# Altium PCB PCB2.PcbDoc (part 1 of 3)
Units mm, origin at the board's own origin, x right, y up, seen from the top; angles counter-clockwise.
Board outline 51.19 x 48.9 mm, 6 copper layers (Top Layer, Internal Plane 1, Signal Layer 3, Signal Layer 2, Internal Plane 2, Bottom Layer), stack 1.58 mm thick; 165 components, 90 nets, 480 pads, 1318 vias.
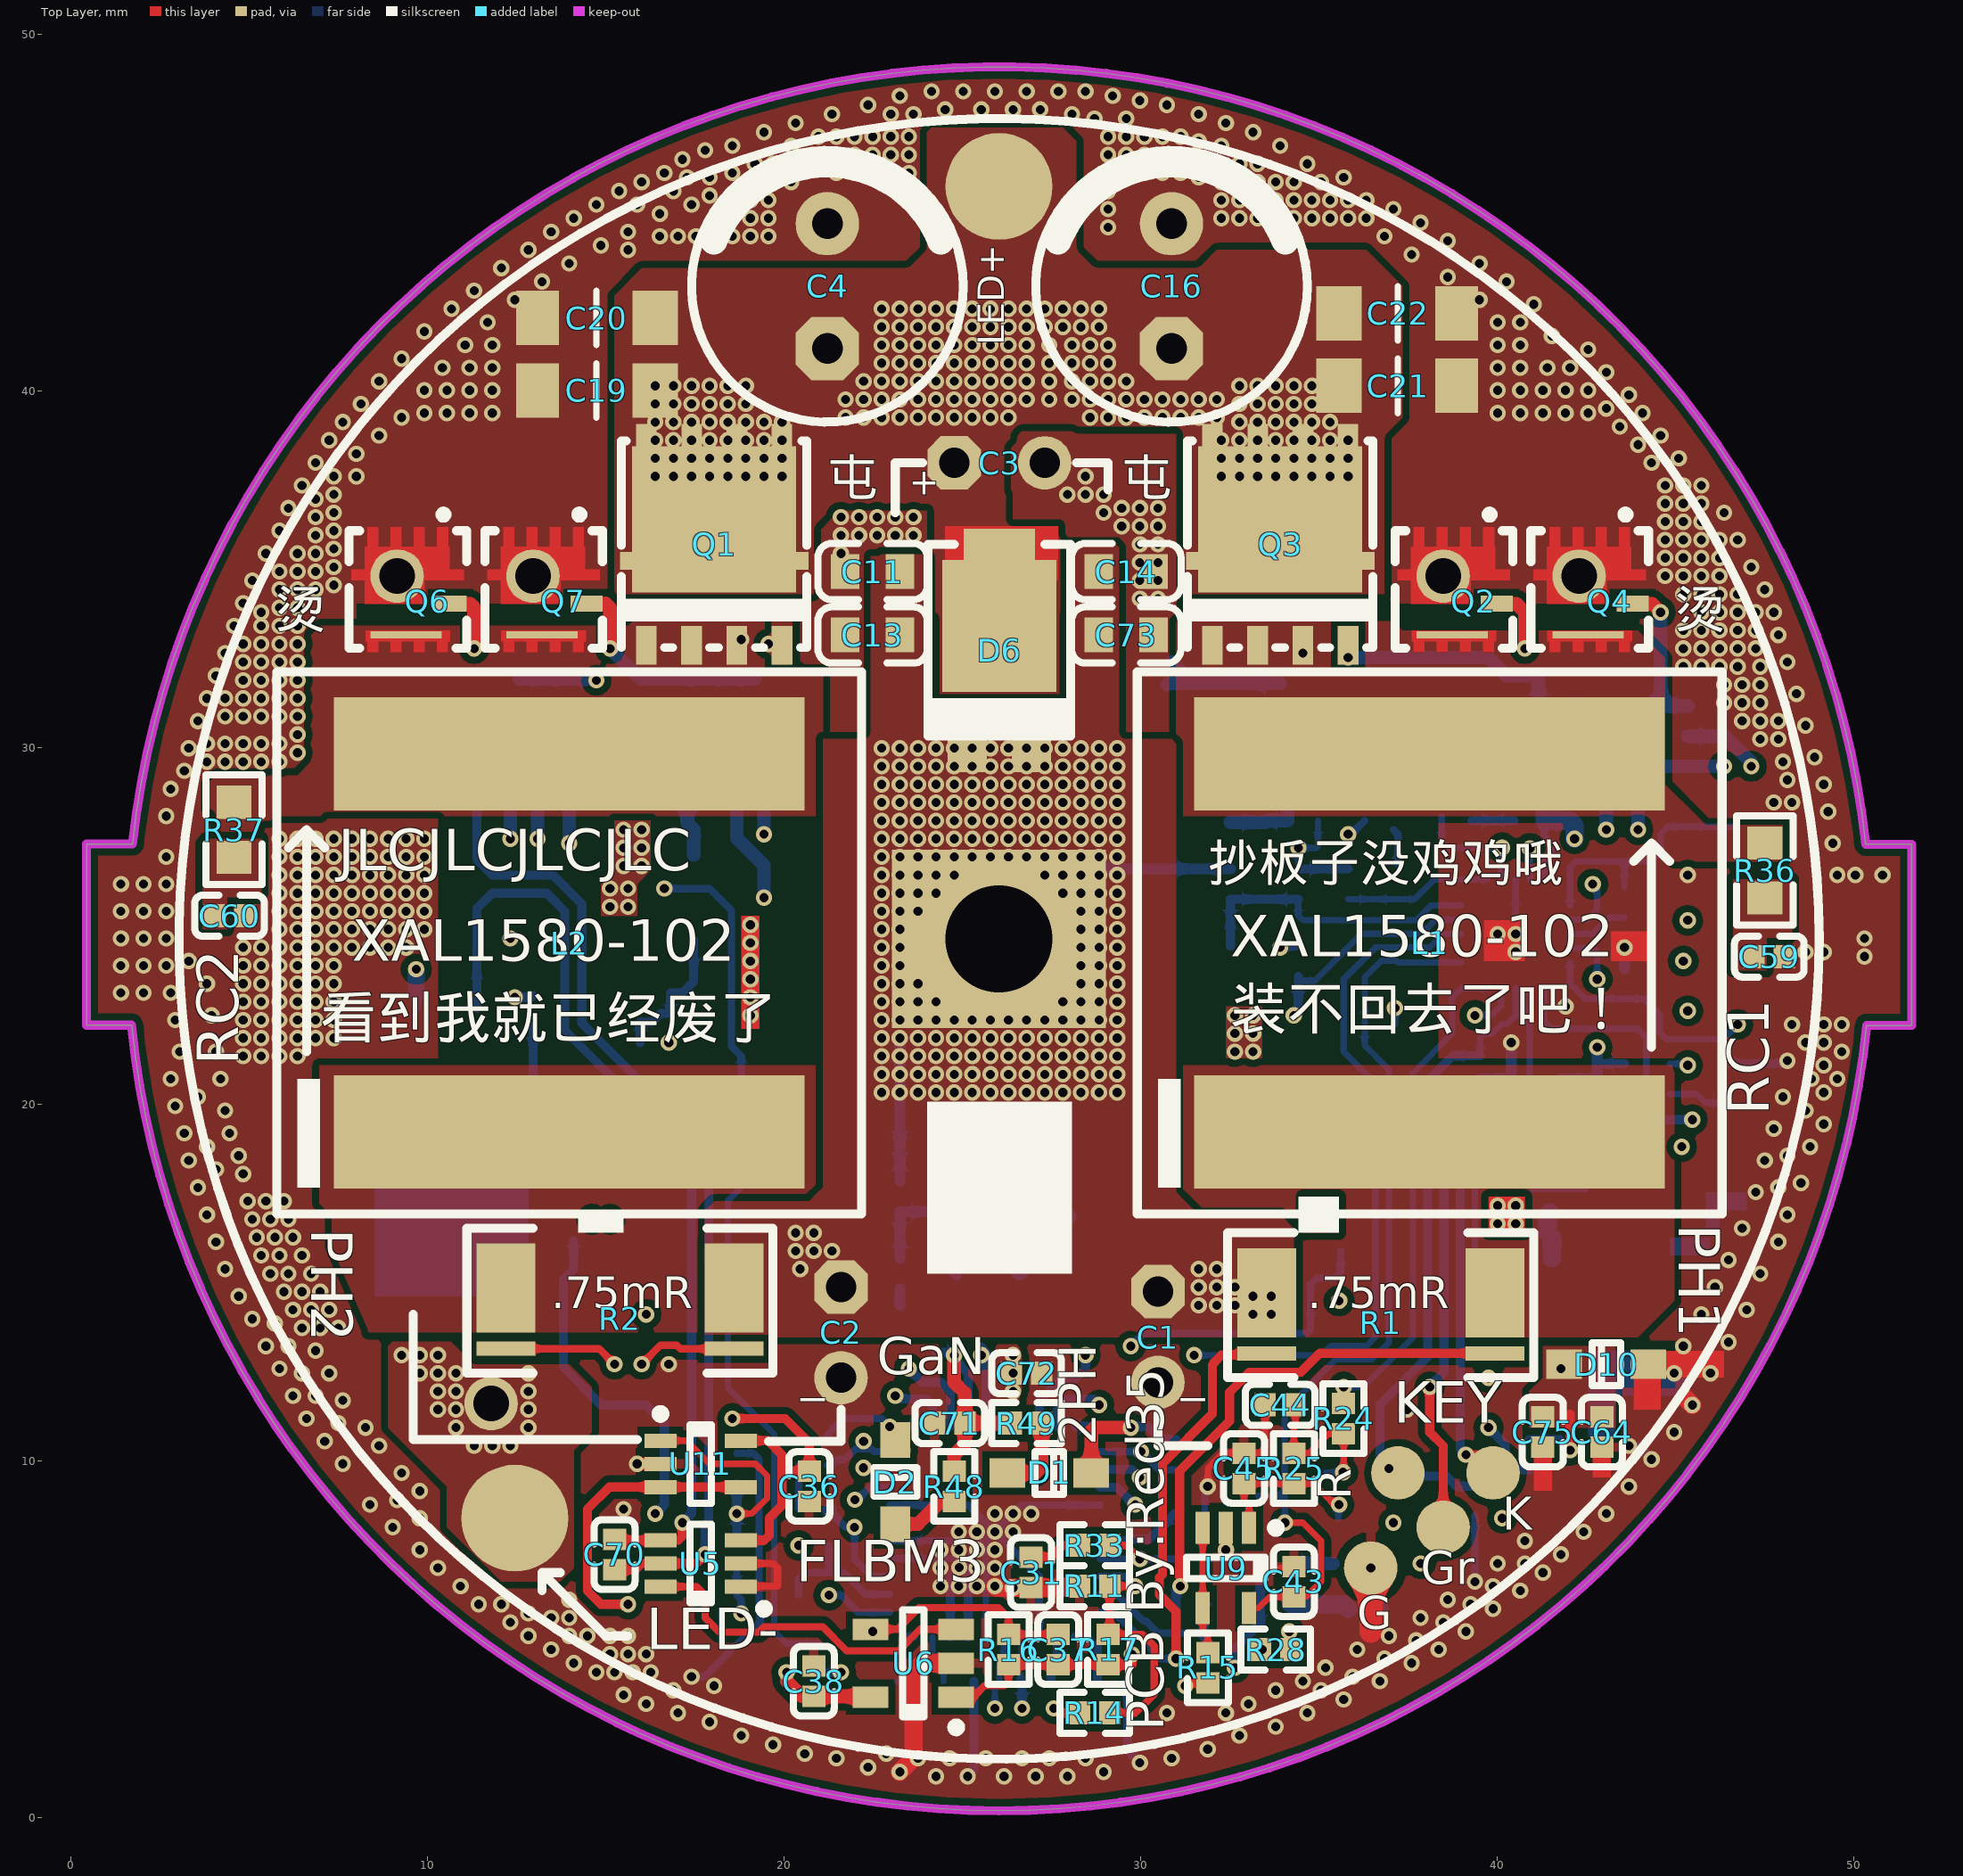
[diagram p0: Top Layer view]
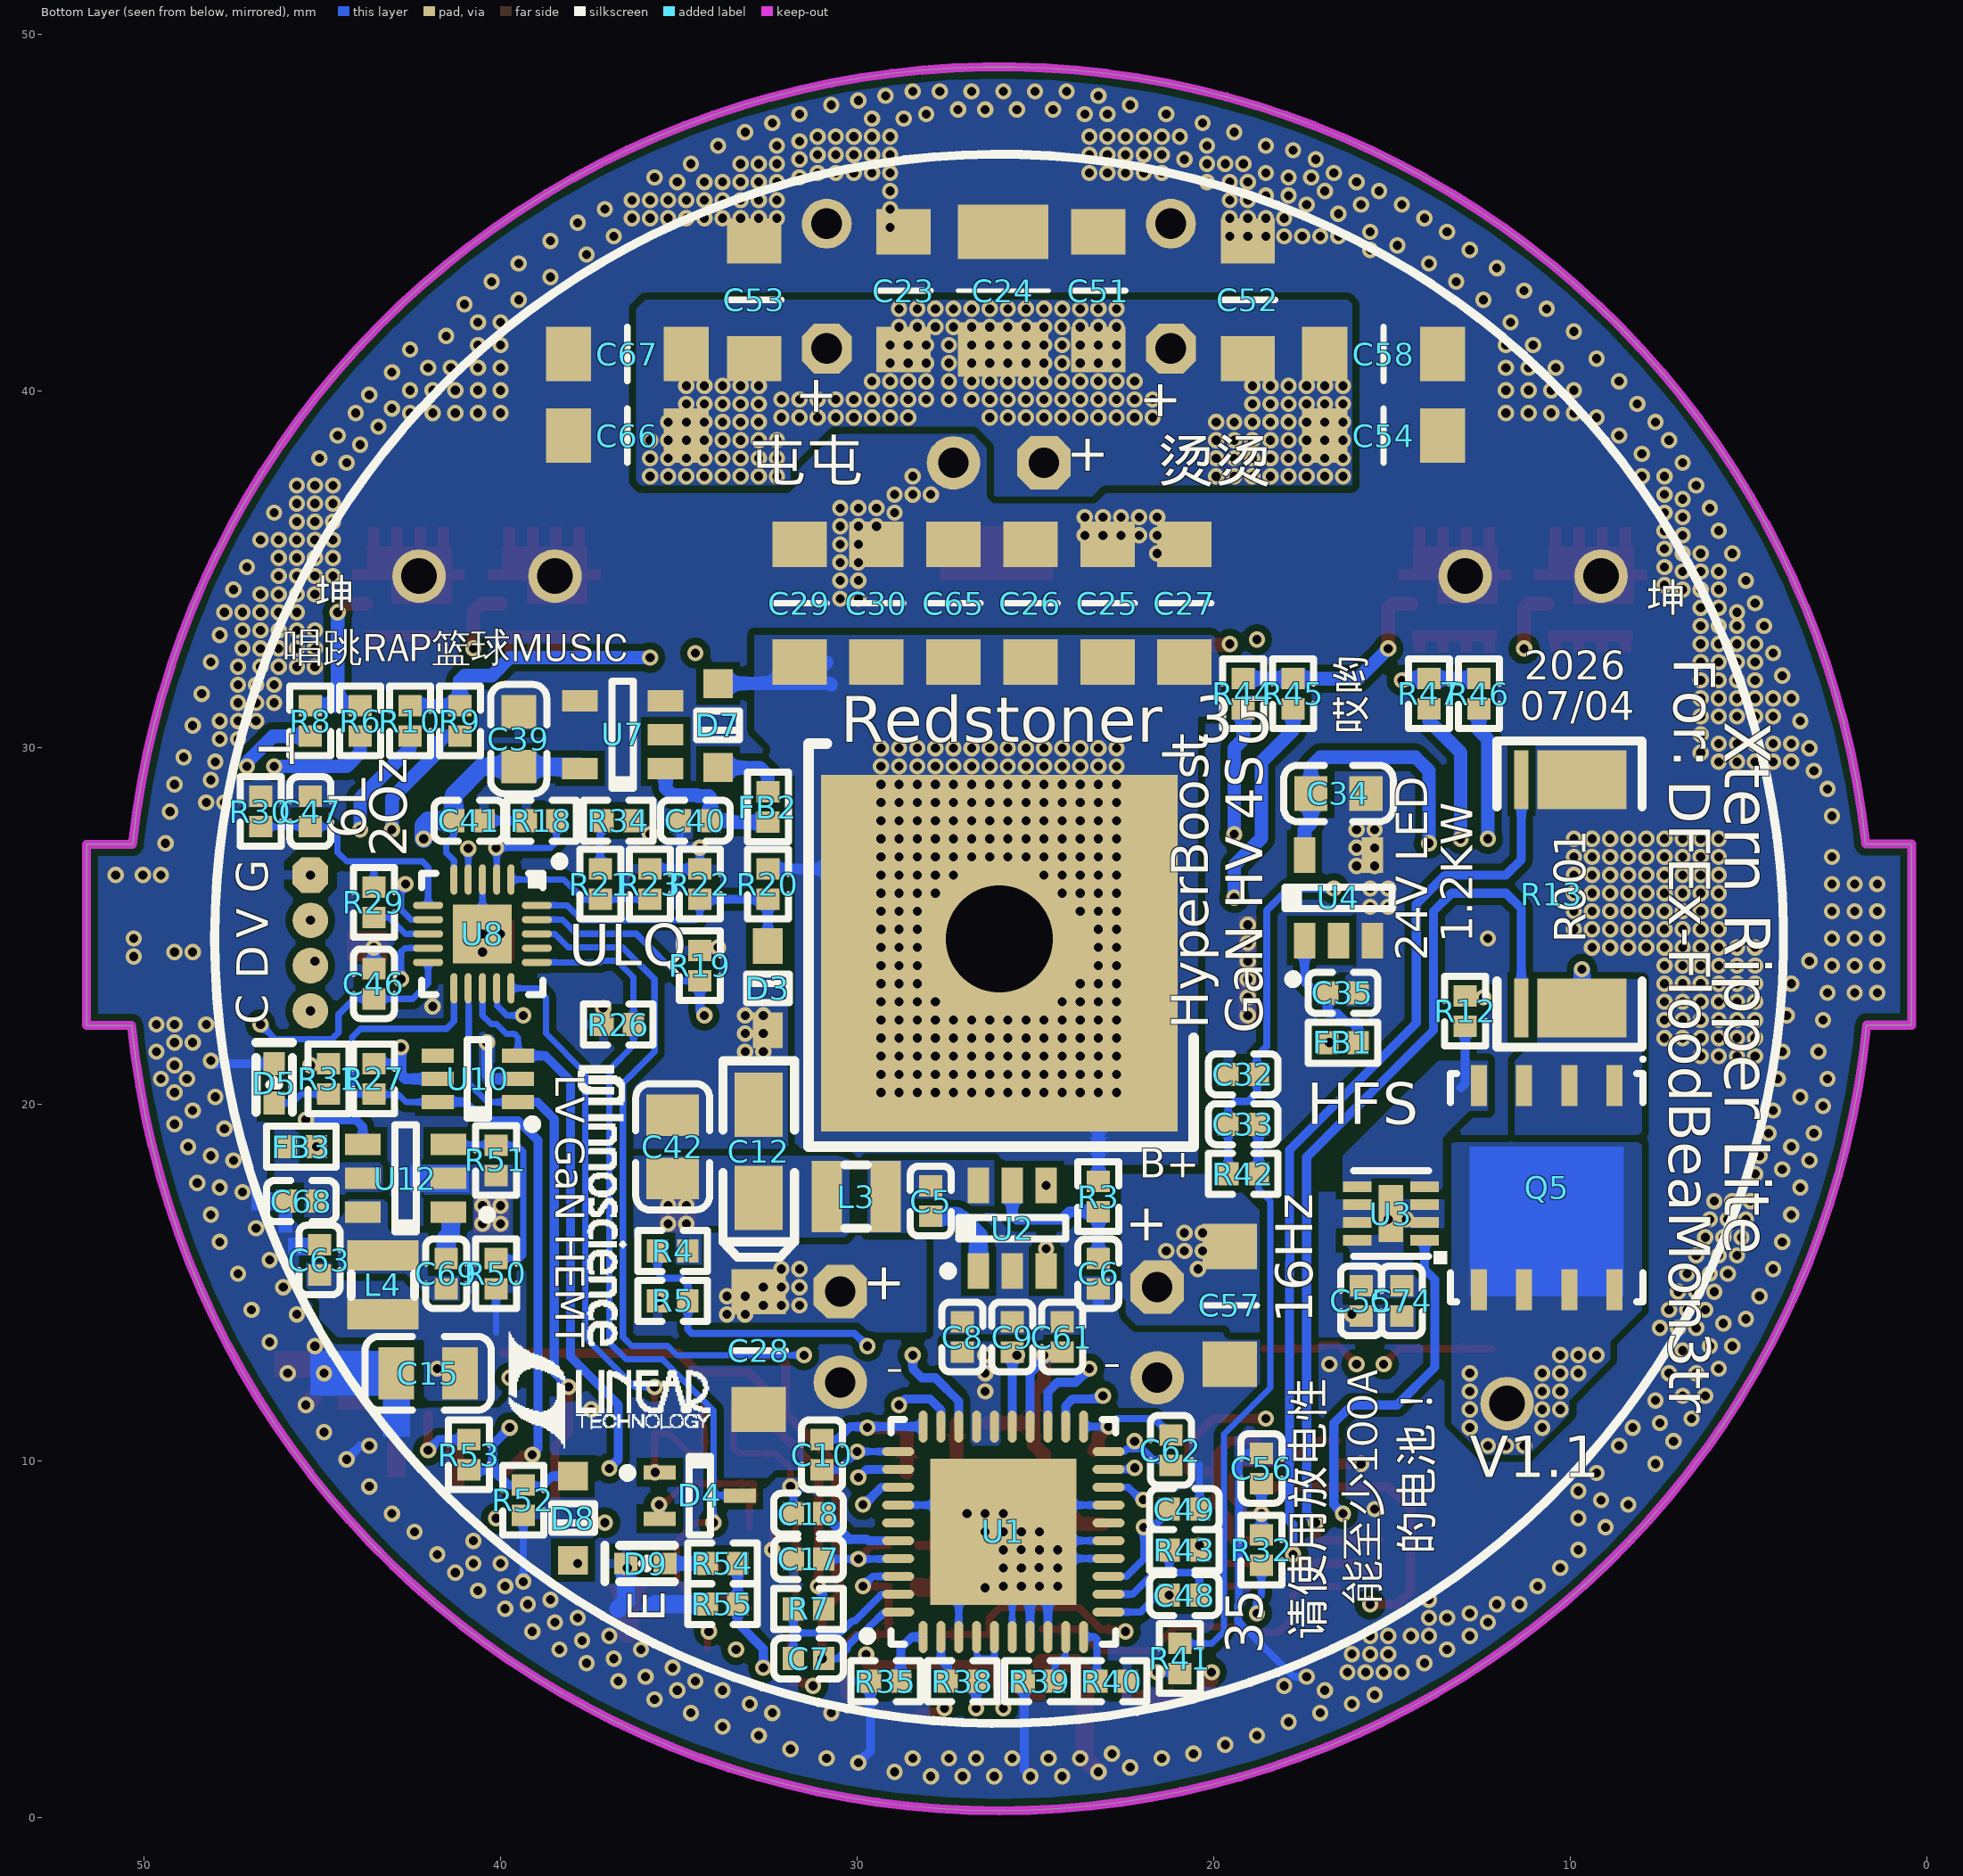
[diagram p1: Bottom Layer view, seen from below]
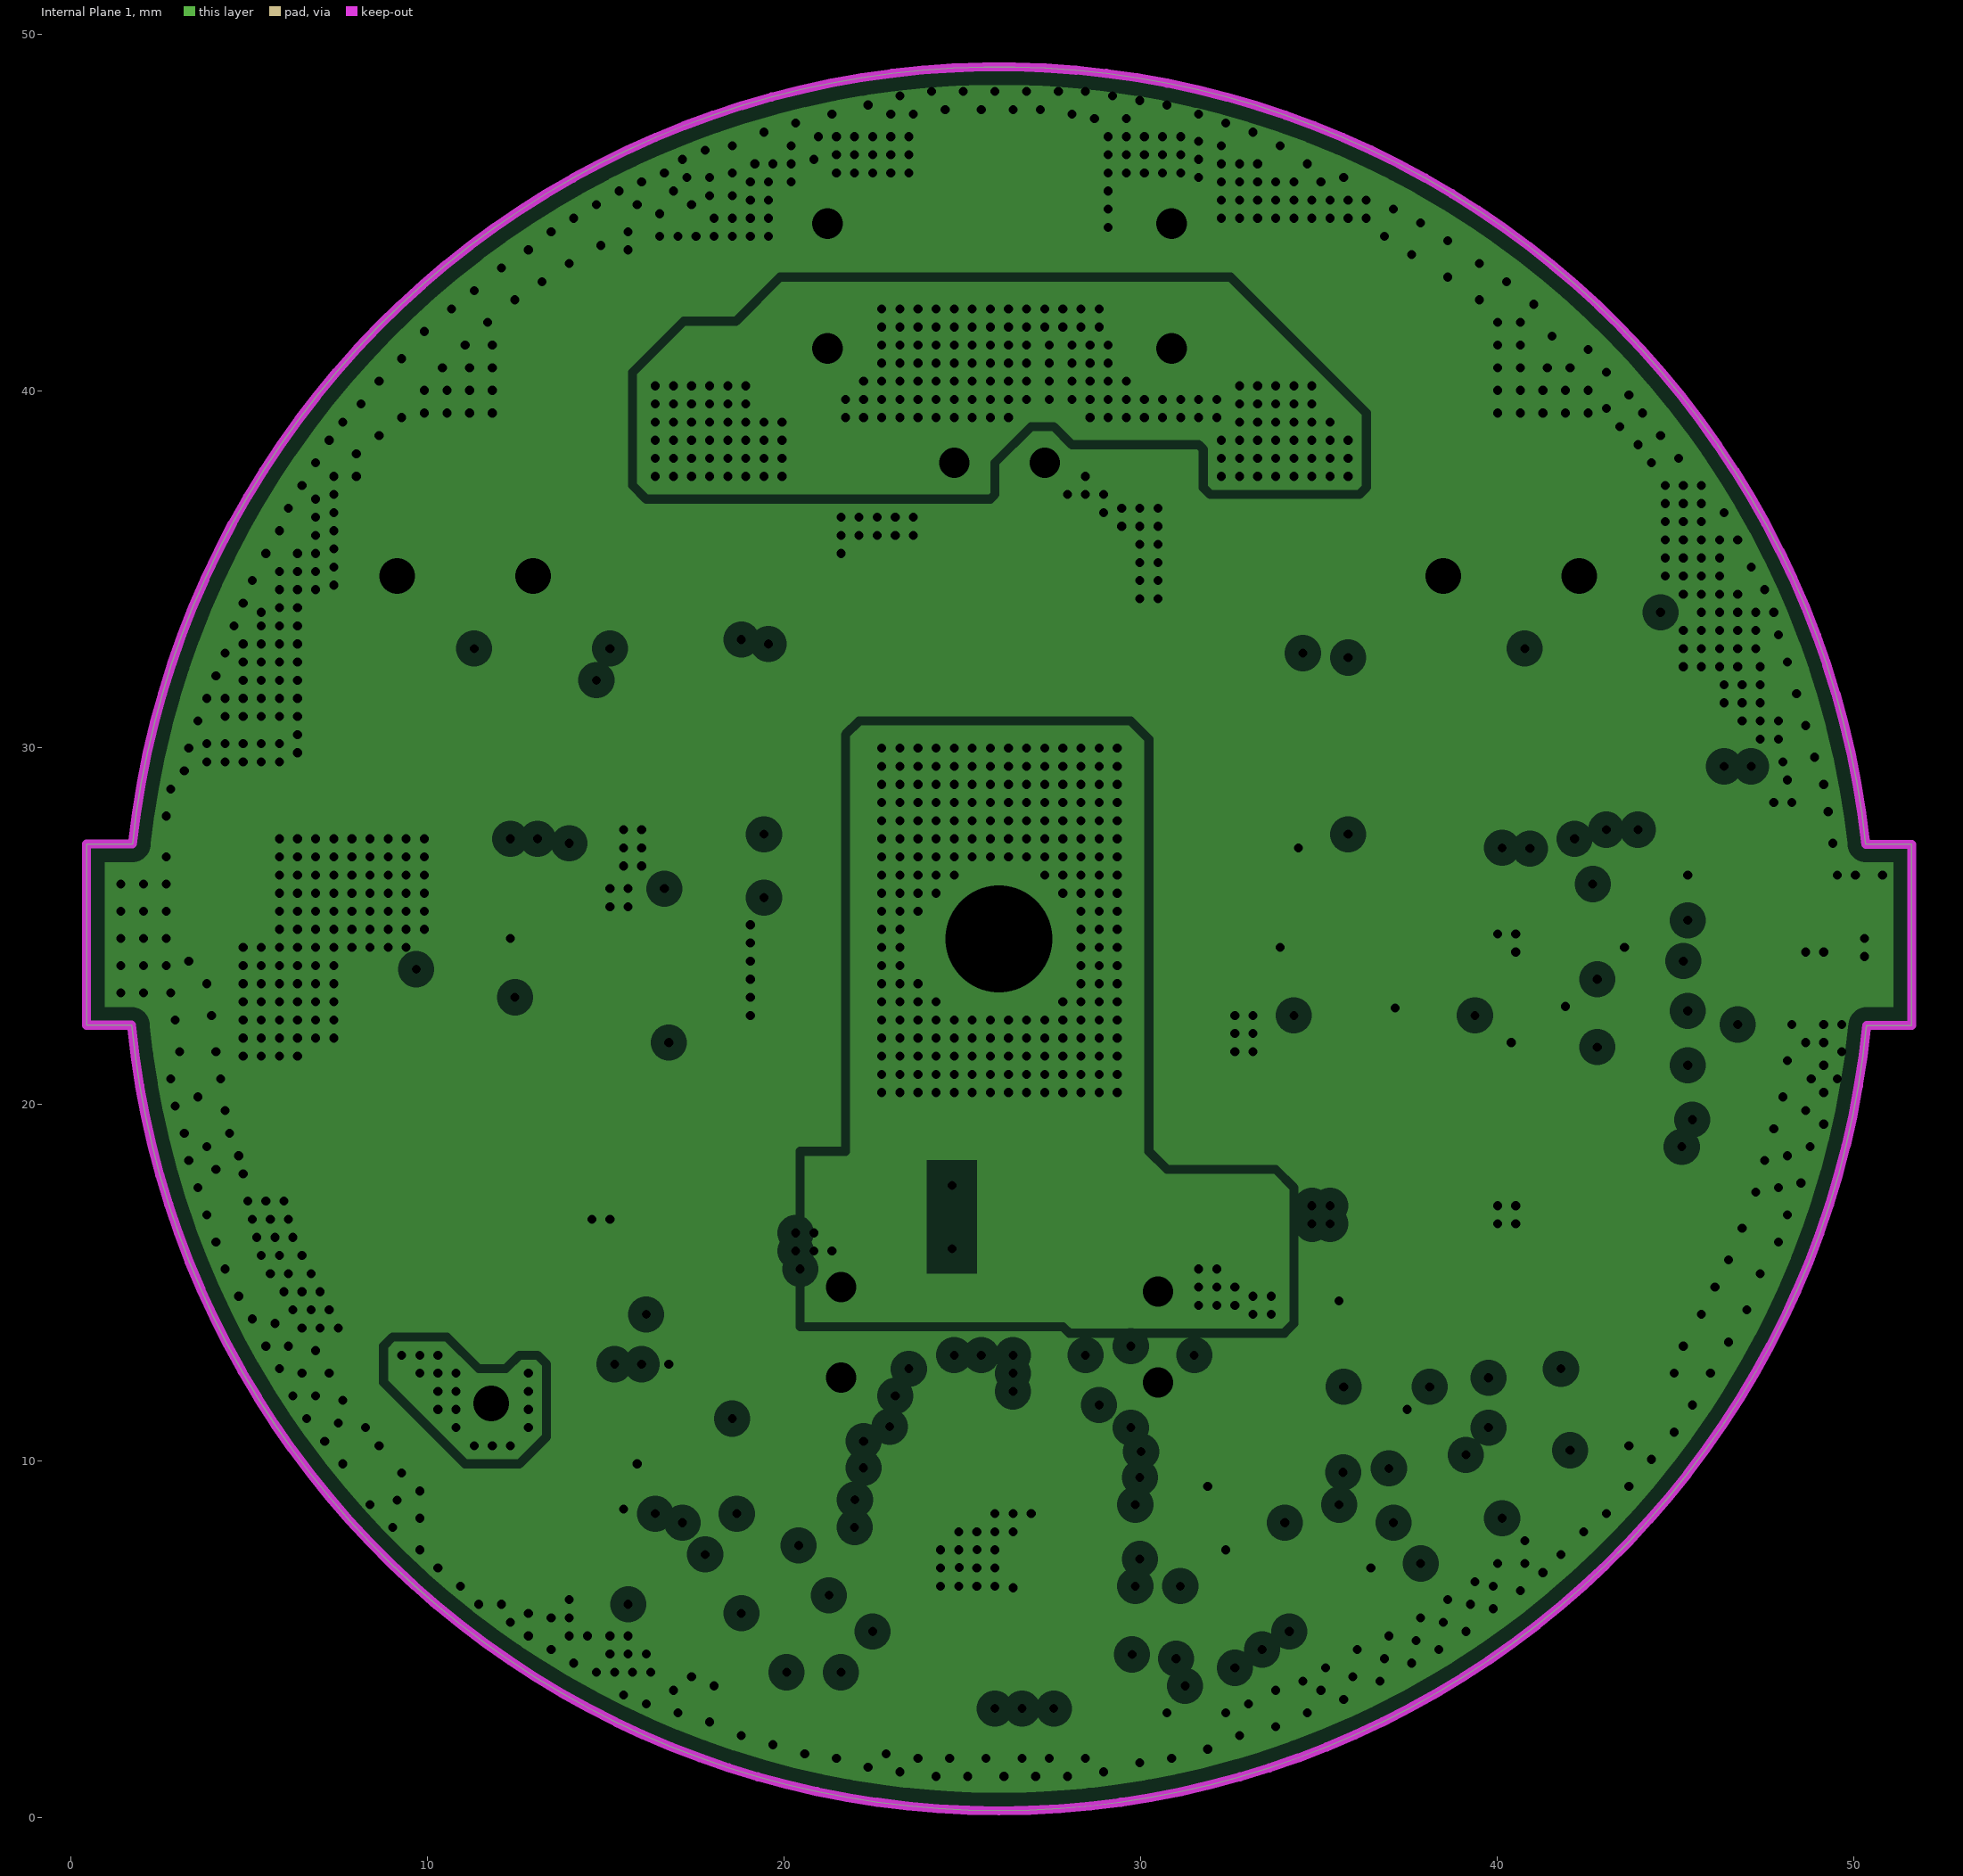
[diagram p2: Internal Plane 1, clearances drawn from the general rule]
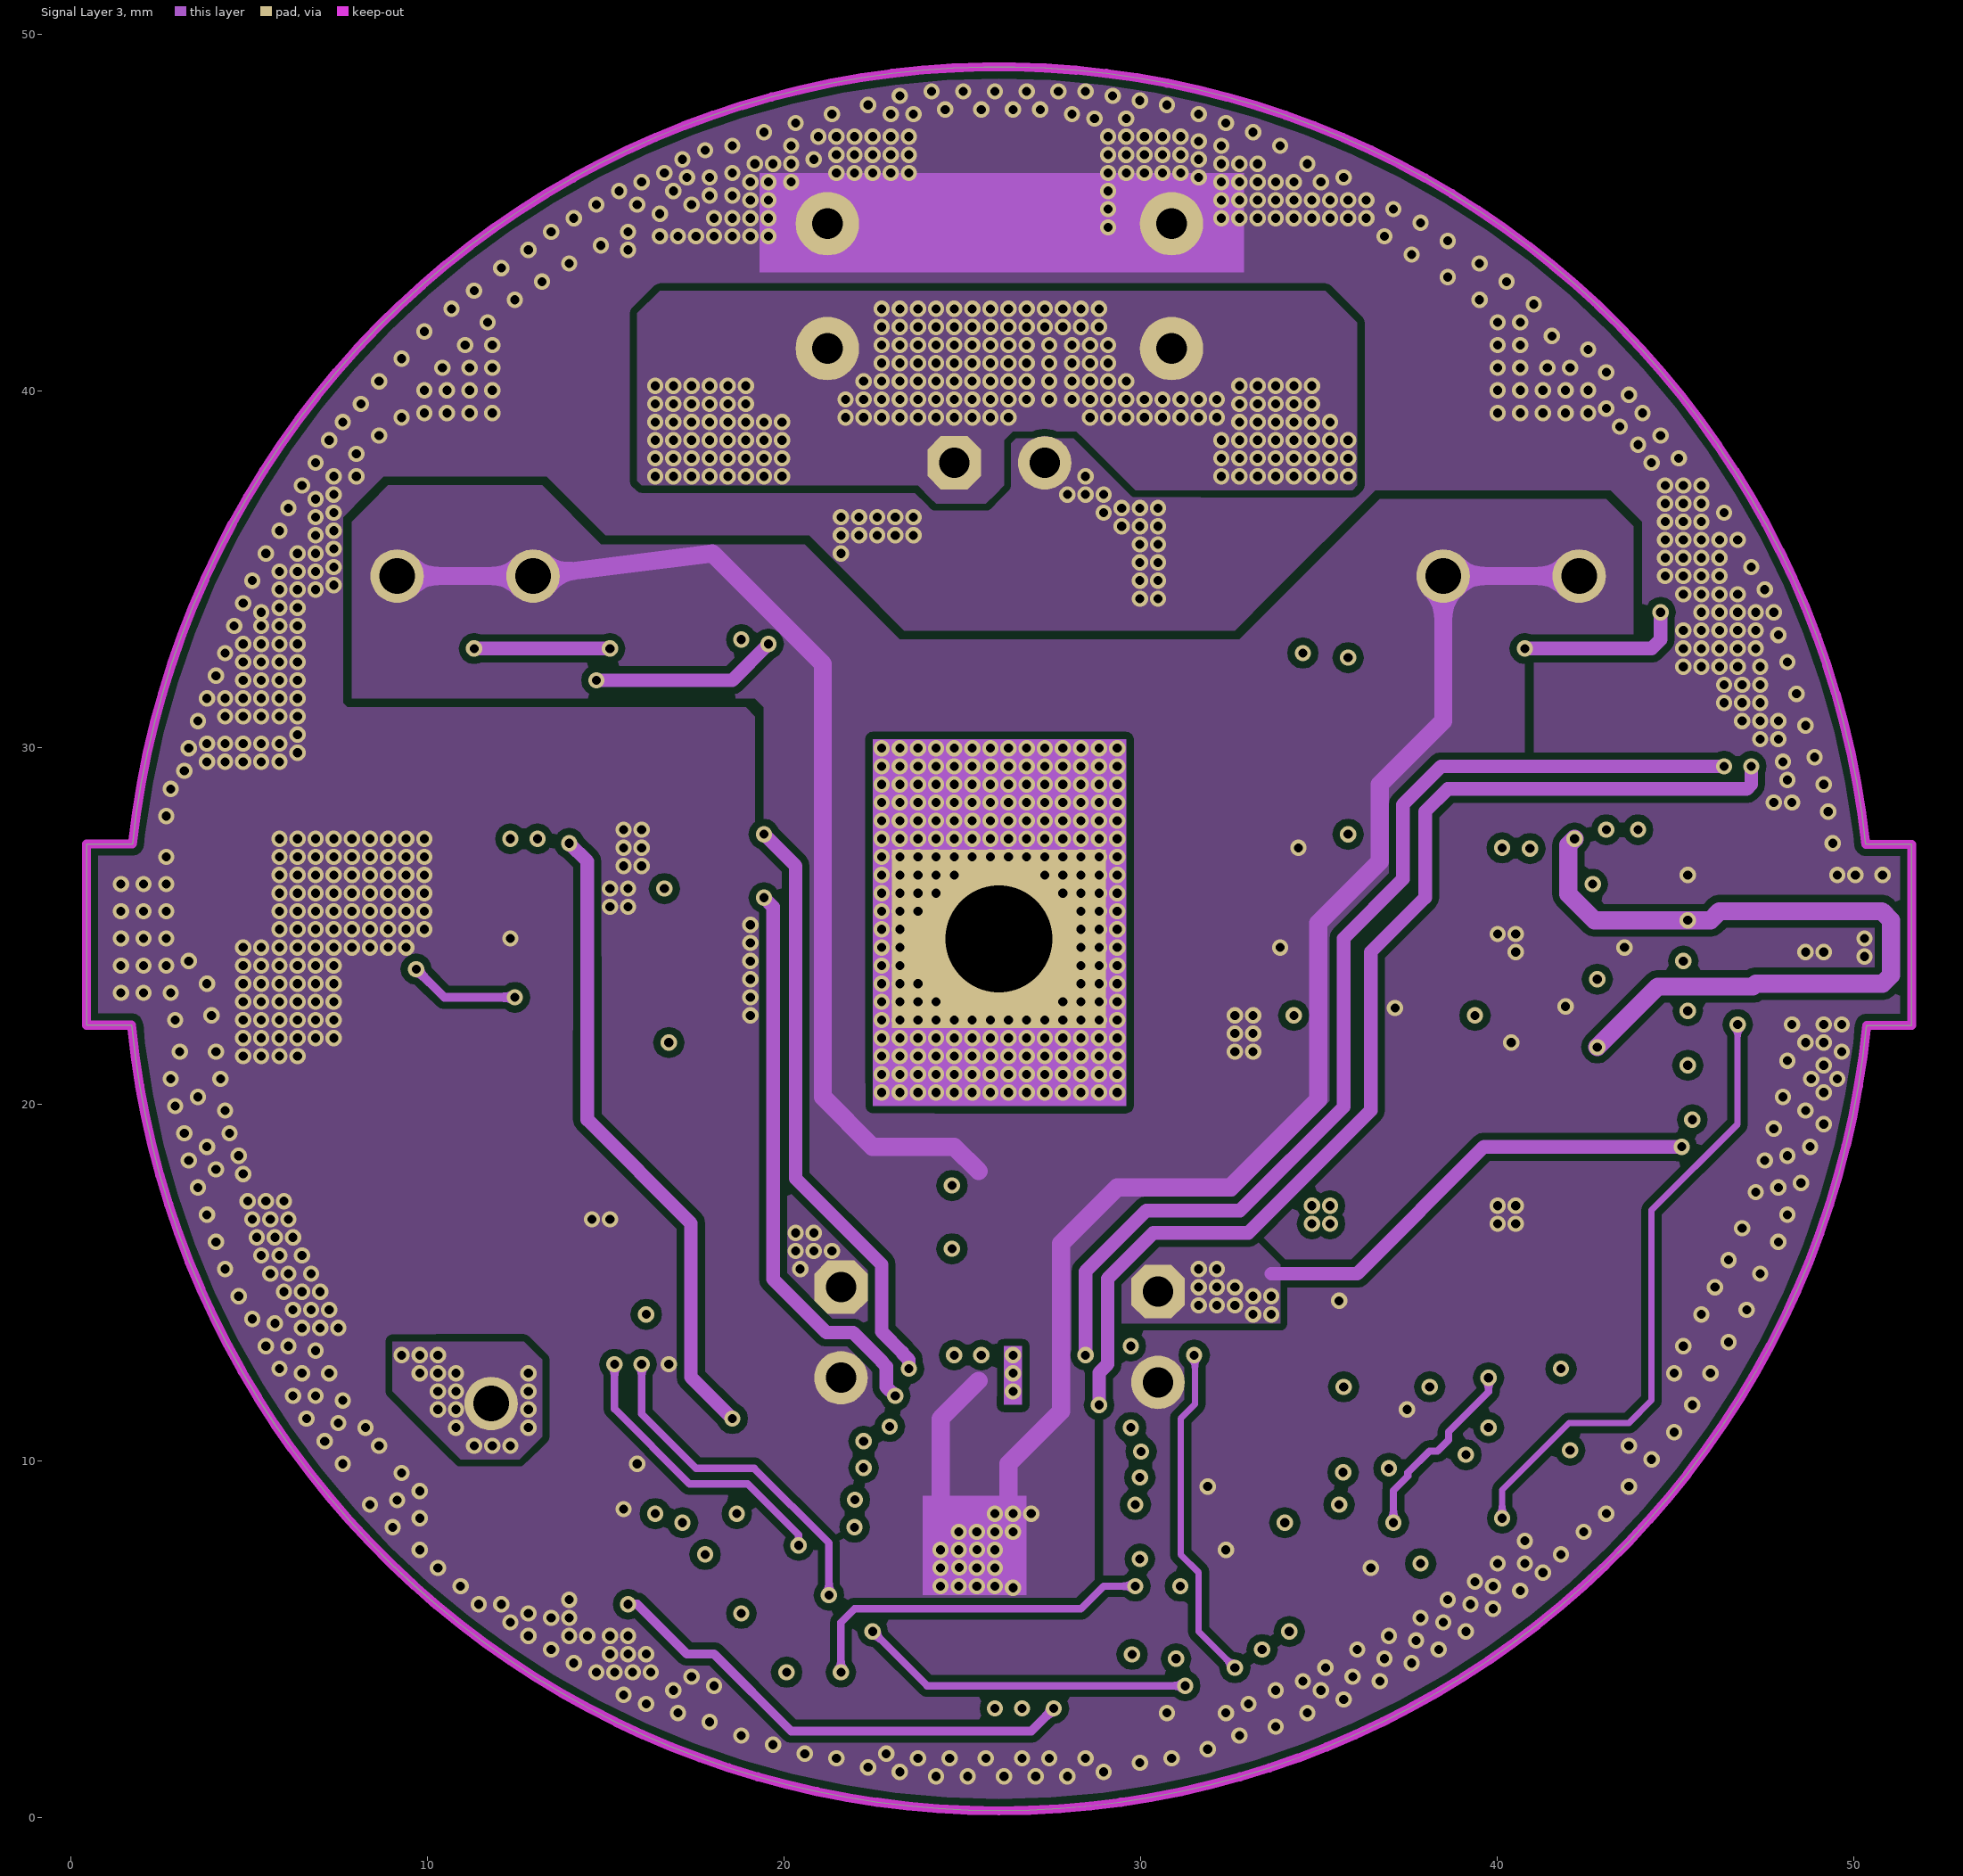
[diagram p3: Signal Layer 3]
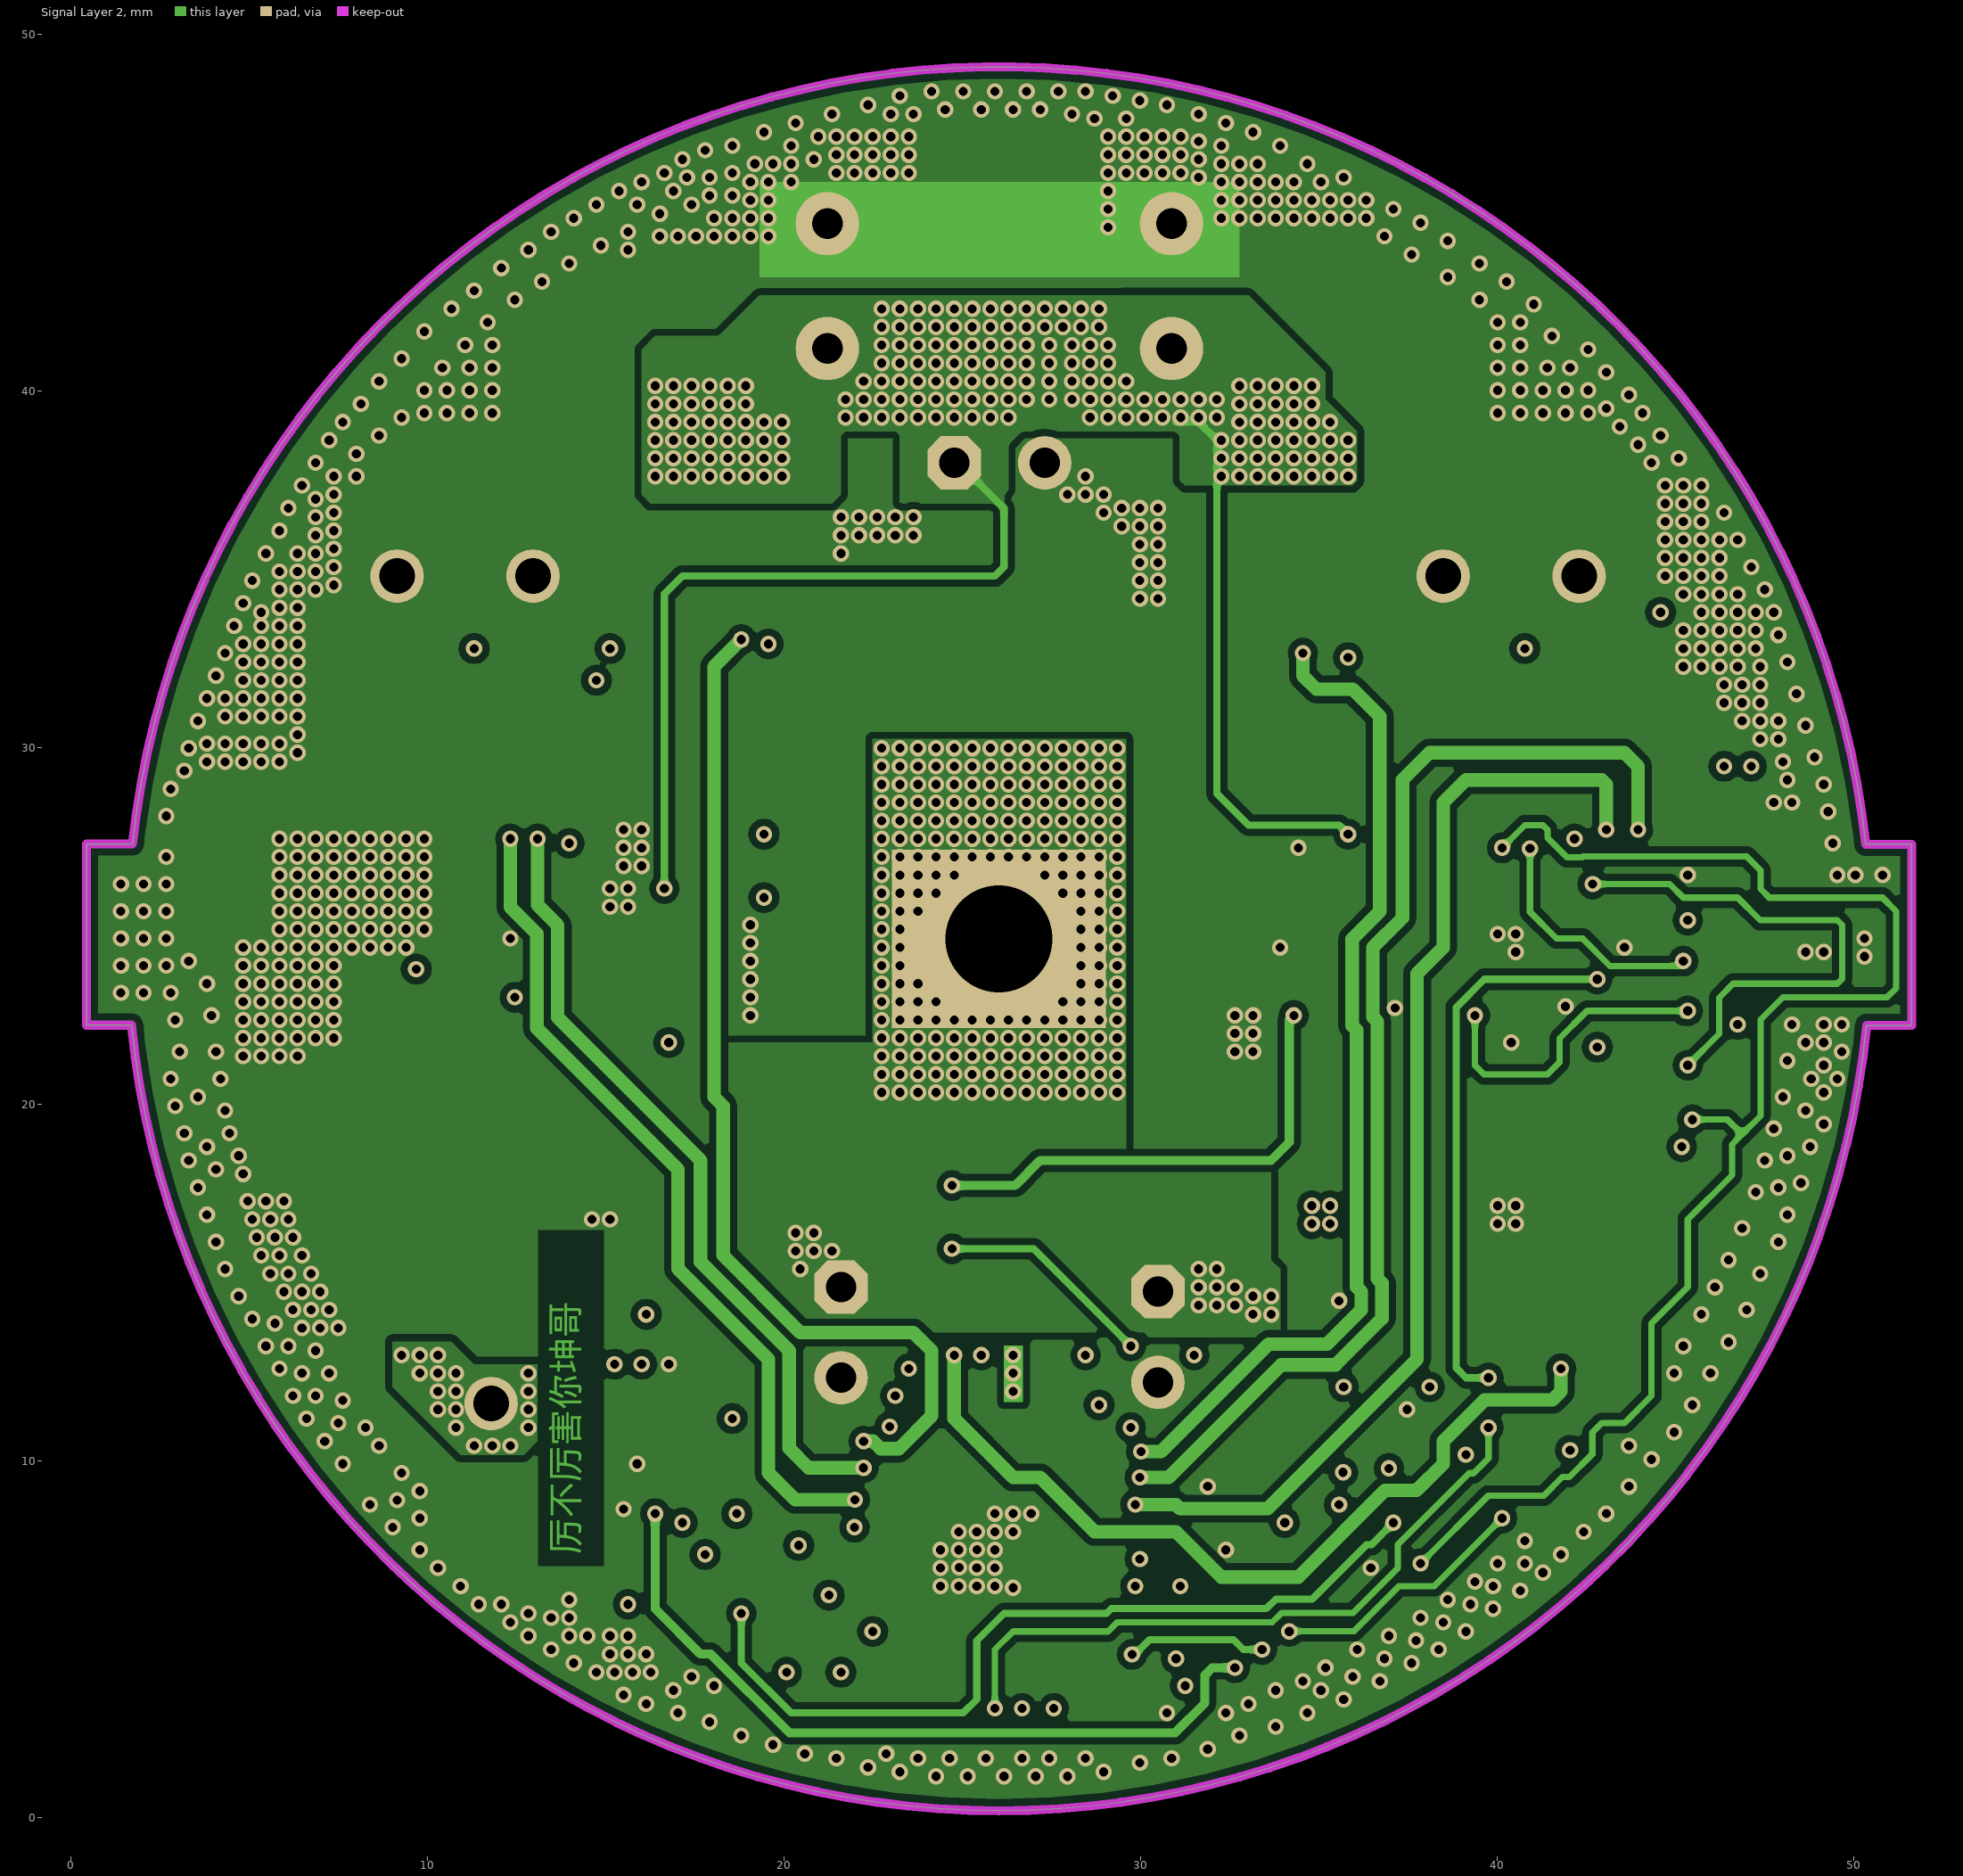
[diagram p4: Signal Layer 2]
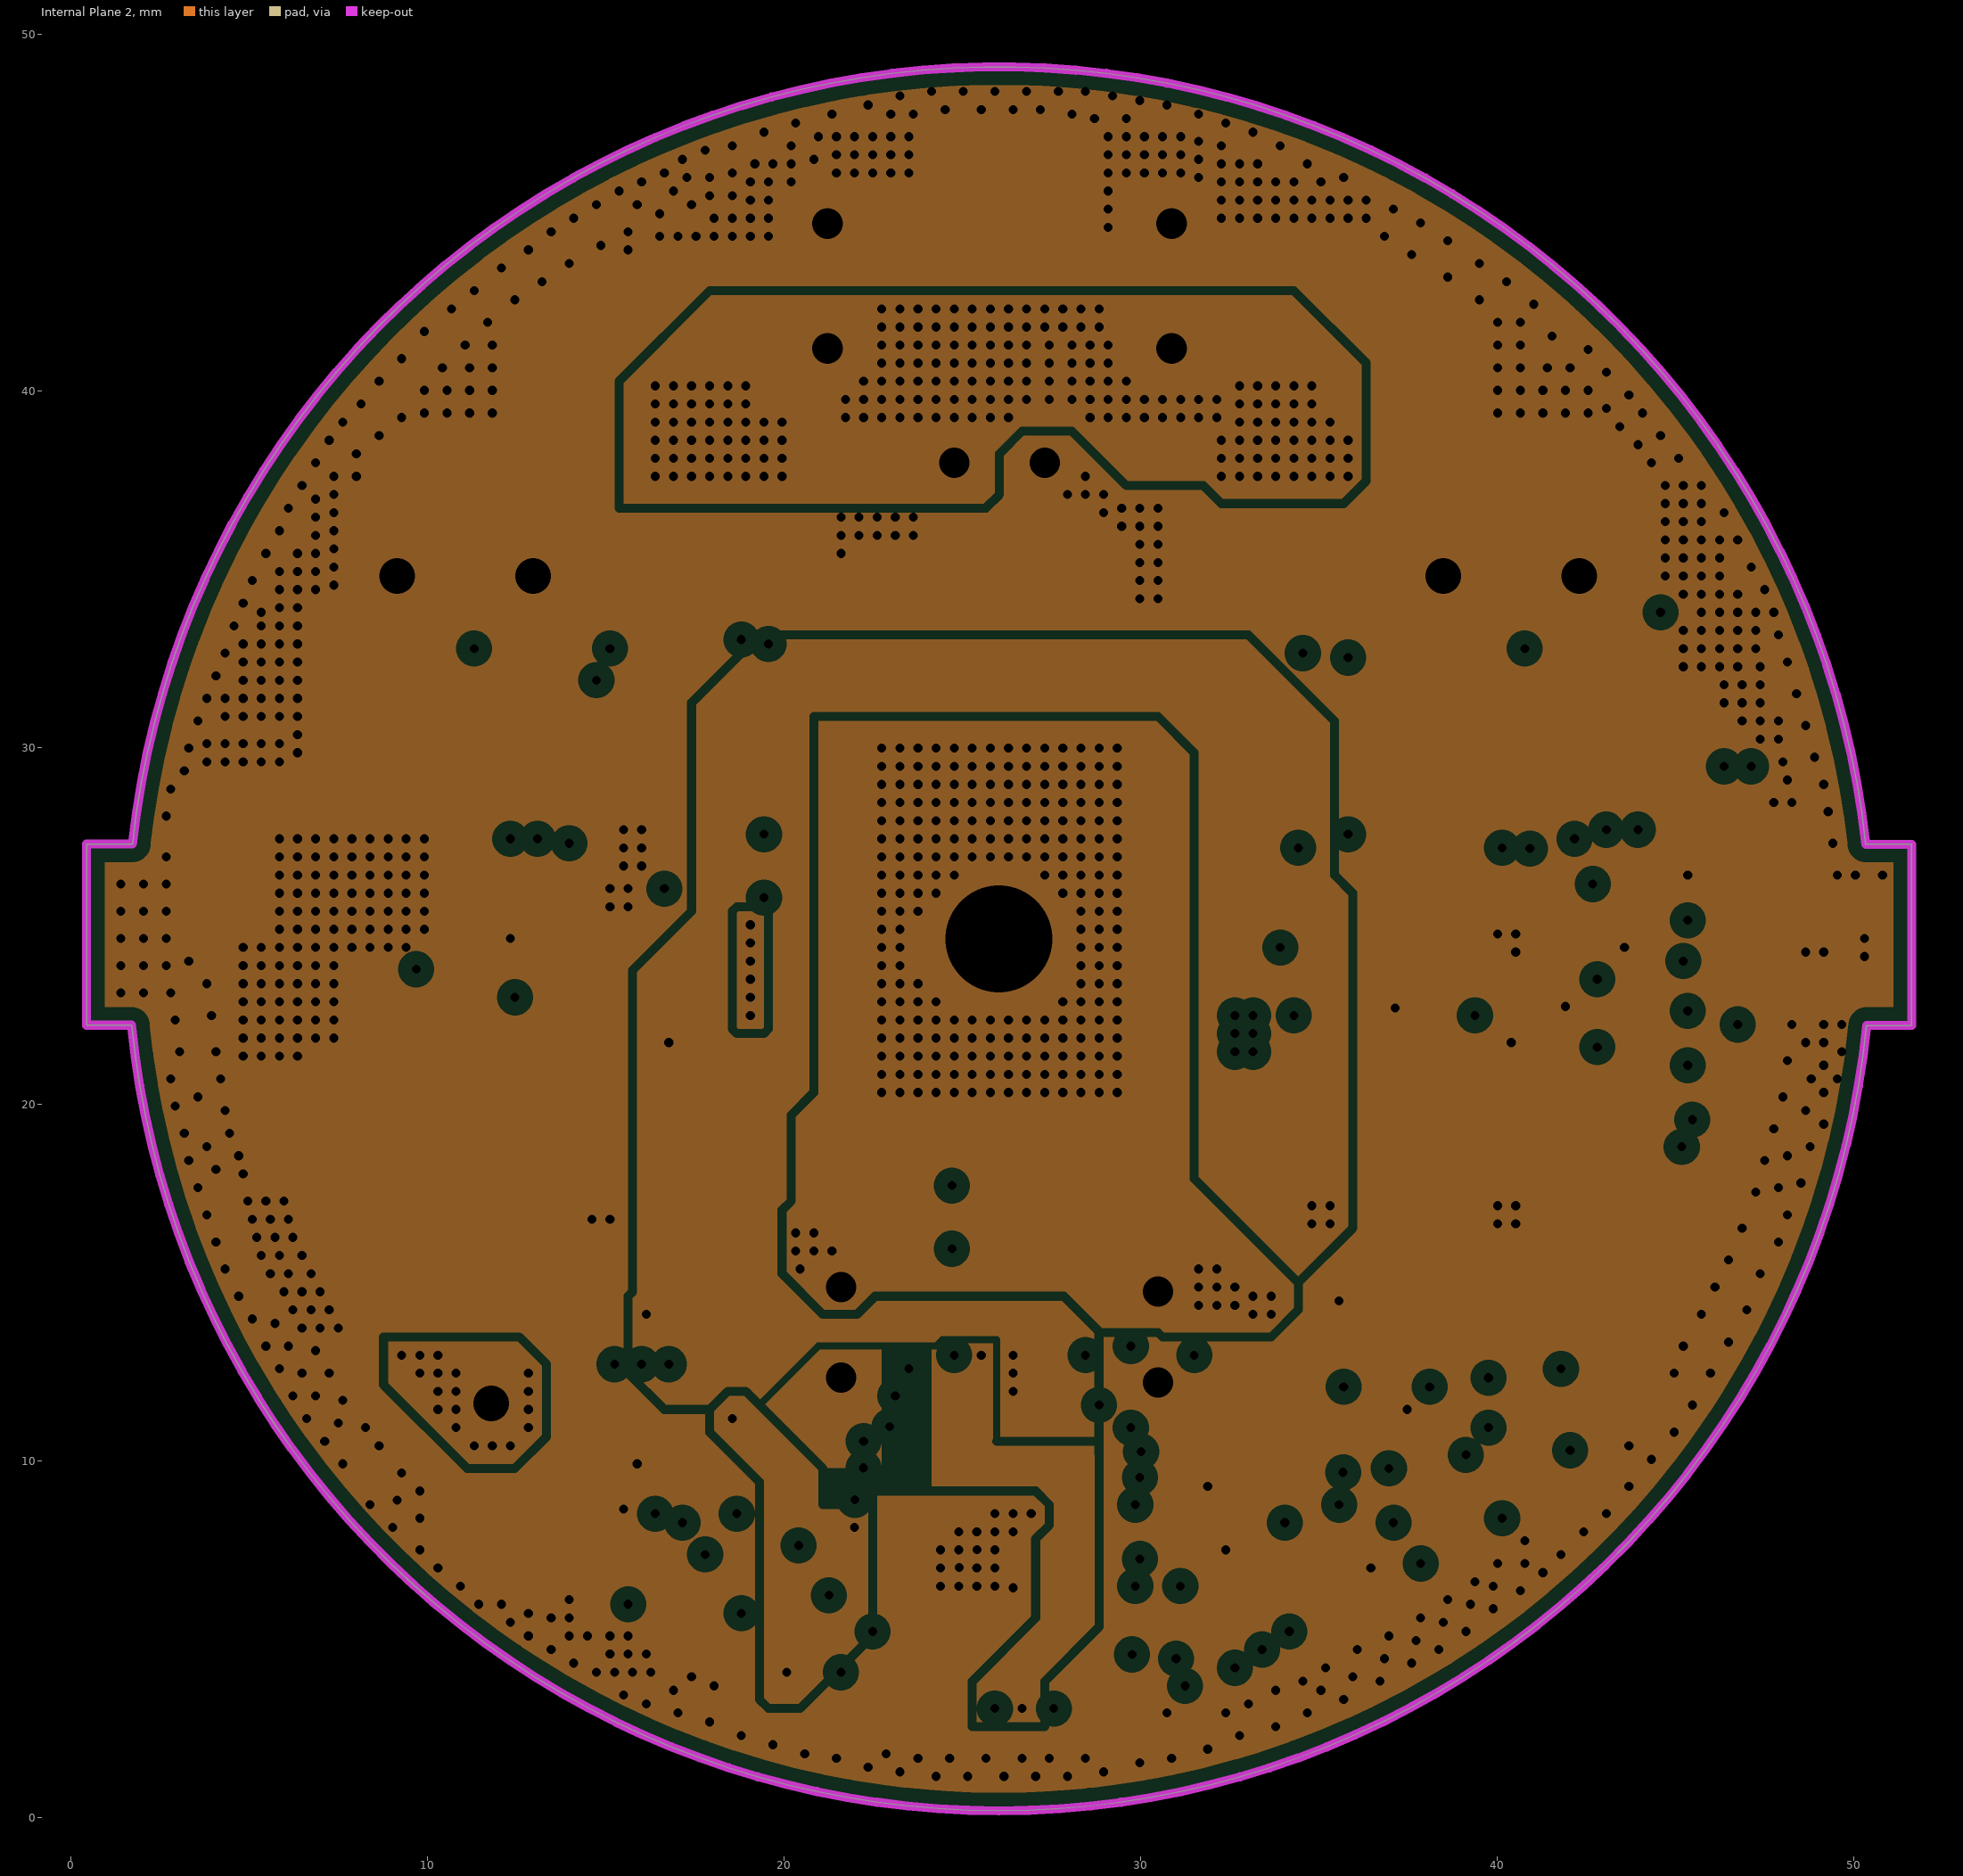
[diagram p5: Internal Plane 2, clearances drawn from the general rule]
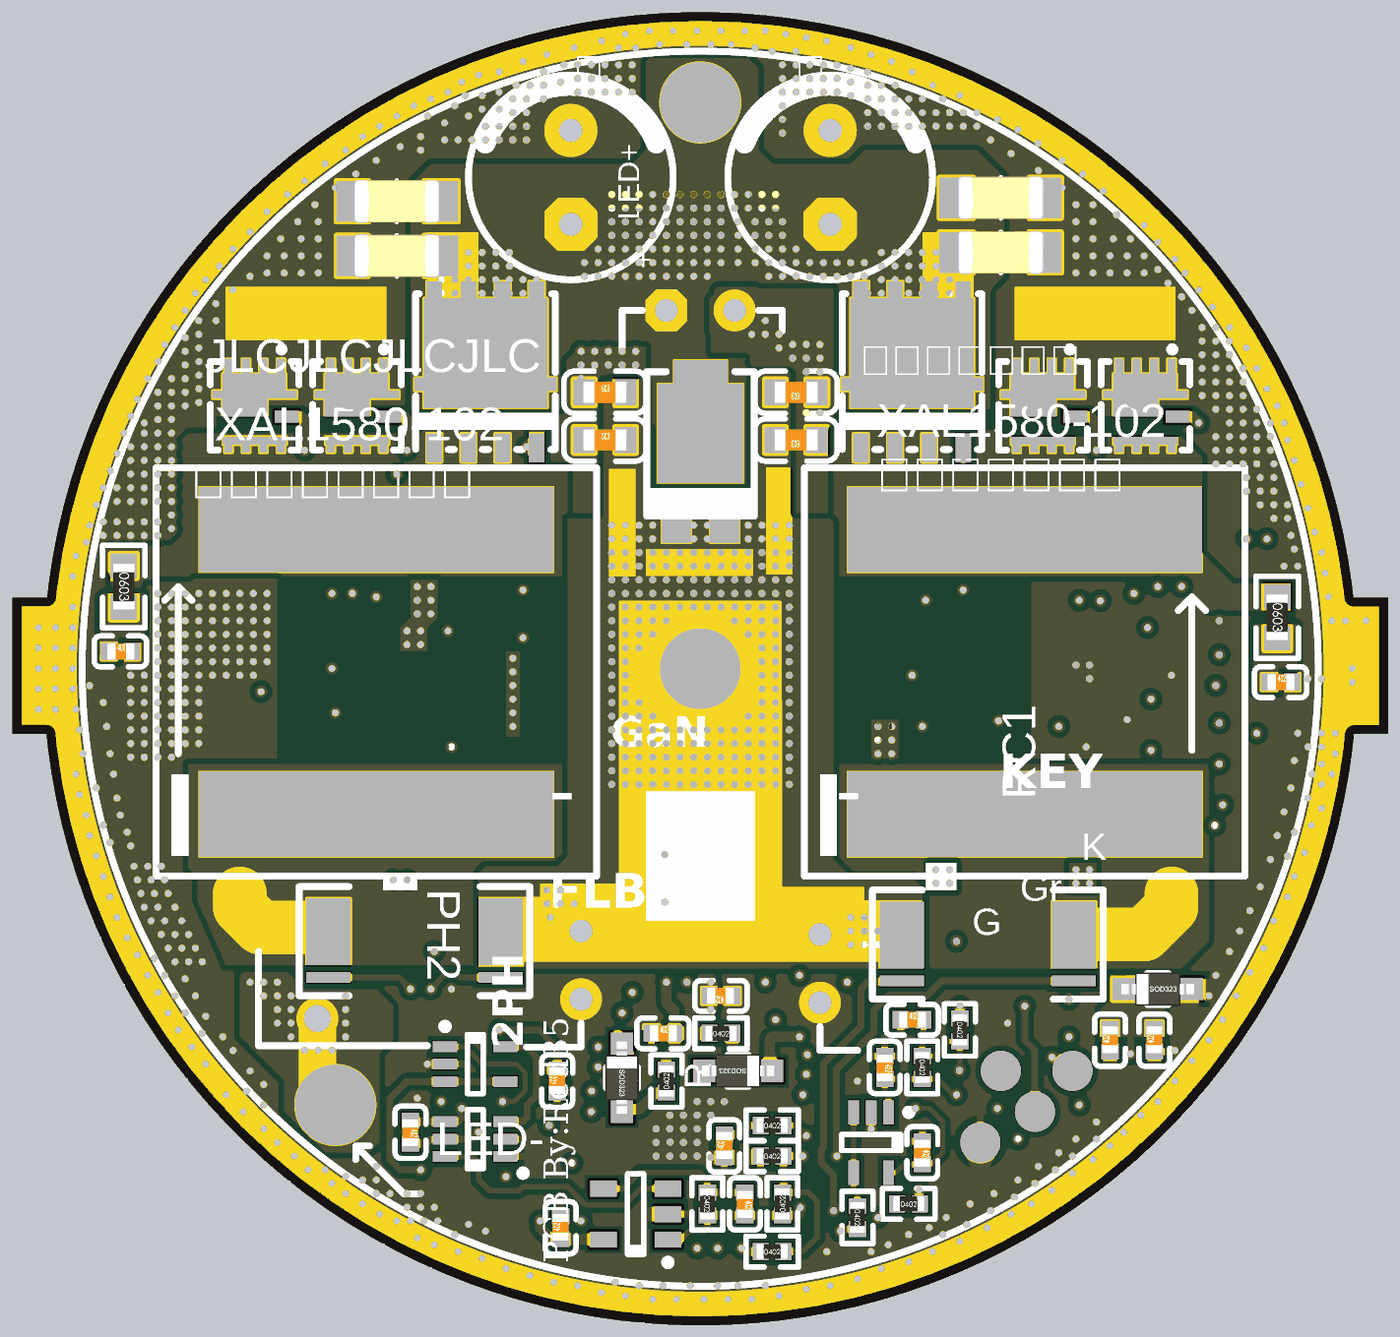
[diagram p8: 3D render of the assembled board from above, using the file's embedded part models]
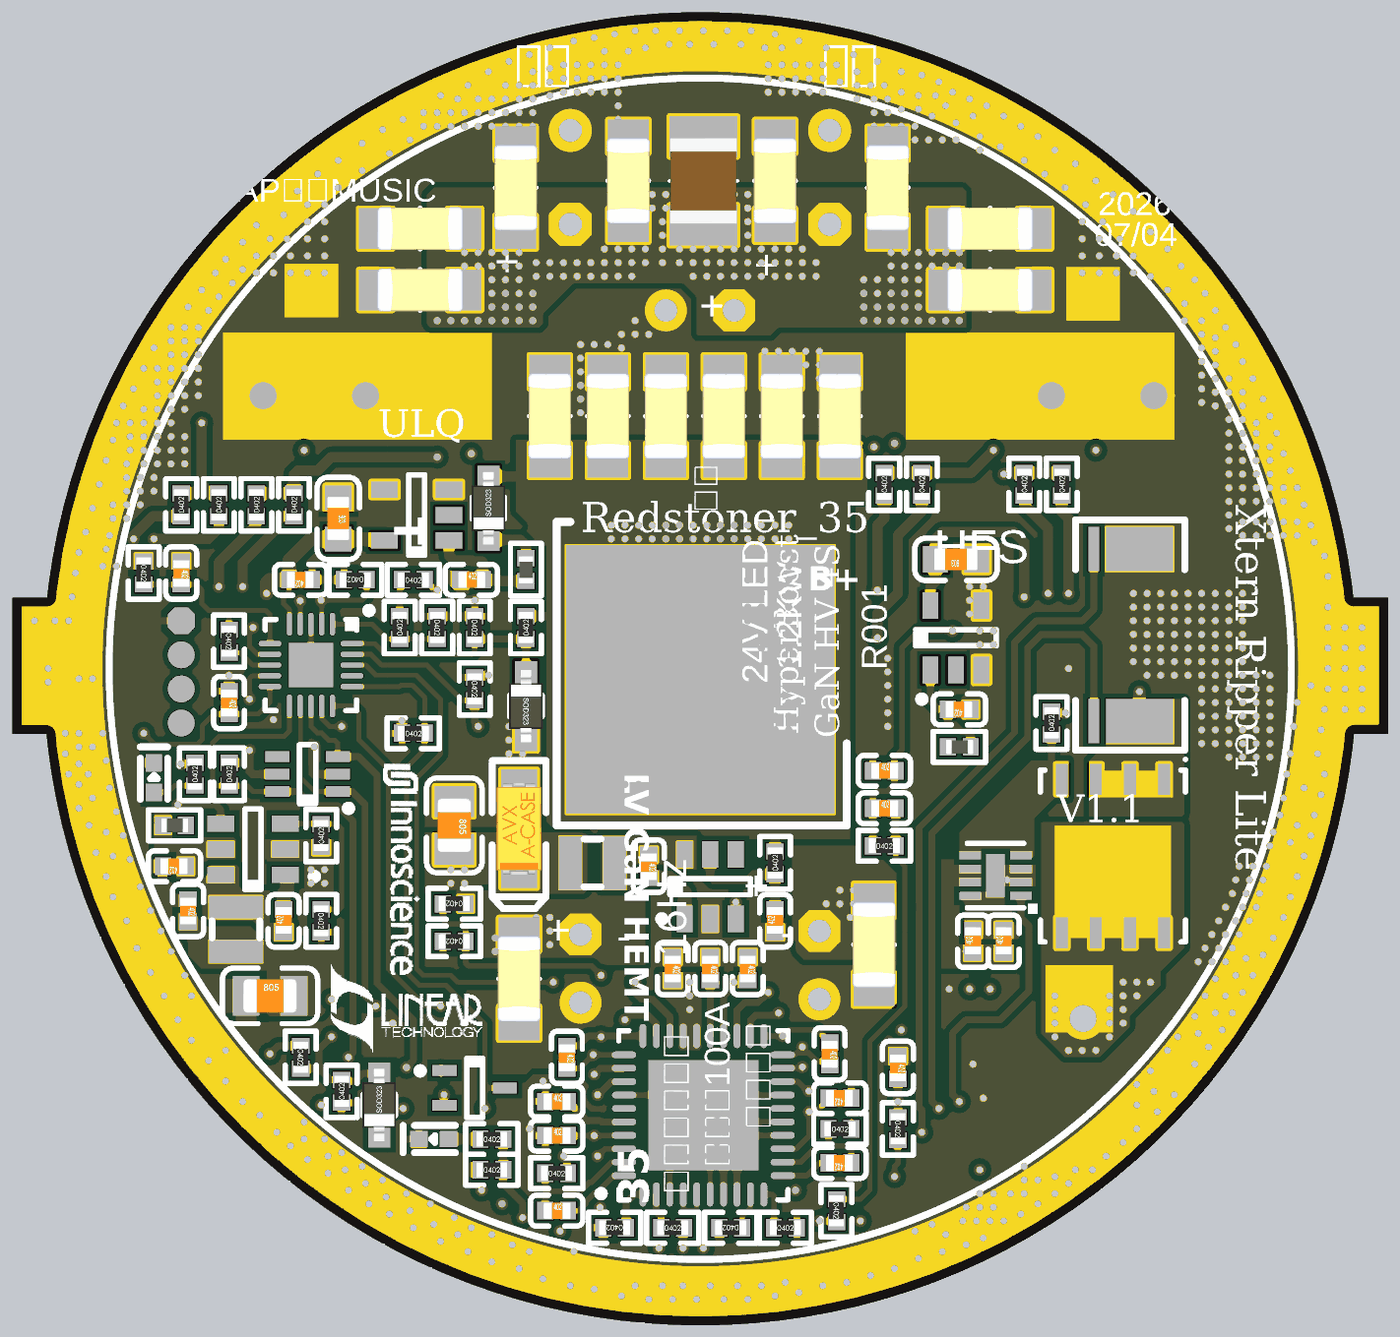
[diagram p9: 3D render of the assembled board from below, using the file's embedded part models]

## Layer stack, top to bottom
Top Solder: solder mask 0.0102, Solder Resist, Dk 3.5
Top Layer: signal copper 0.07
Dielectric 1: core 0.254, FR-4, Dk 4.2
Internal Plane 1: plane copper 0.07
Dielectric 3: prepreg 0.2887, Dk 4.2
Signal Layer 3: signal copper 0.07
Dielectric 4: core 0.27, Dk 4.2
Signal Layer 2: signal copper 0.036
Dielectric 2: core 0.254, Dk 4.2
Internal Plane 2: plane copper 0.07
Dielectric 5: prepreg 0.127, Dk 4.2
Bottom Layer: signal copper 0.07
Bottom Solder: solder mask 0.0102, Solder Resist, Dk 3.5

## Board outline
0.432,22.204 0.432,27.284 1.72,27.284 cw(c26.025,24.628) 50.331,27.277 51.618,27.277 51.618,22.197 51.616,22.2 50.355,22.2 50.354,22.2 cw(c26.025,24.628) 1.695,22.206 1.696,22.206

## Design rules (kind name [scope] priority, off if disabled: settings)
Clearance [All] p1: gap=0.2
DiffPairsRouting [All] p1: maxlimit=0.254 minlimit=0.203 mostfreqgap=0.229 toplayer_minwidth=0.203 toplayer_maxwidth=0.254 toplayer_prefwidth=0.254 midlayer1_minwidth=0.203 midlayer1_maxwidth=0.254 midlayer1_prefwidth=0.254 midlayer2_minwidth=0.203 midlayer2_maxwidth=0.254 midlayer2_prefwidth=0.254 bottomlayer_minwidth=0.203 bottomlayer_maxwidth=0.254 bottomlayer_prefwidth=0.254 maxuncoupledlength=12.7
PlaneClearance [All] p1: clearance=0.381
PlaneConnect [All] p1: planeconnectstyle=Direct reliefexpansion=0.508 reliefentries=4 reliefconductorwidth=0.254 reliefairgap=0.254
PolygonConnect PolygonConnect_1 [IsVia] p1: connectstyle=Direct reliefconductorwidth=0.254 reliefentries=4 polygonreliefangle="90 Angle" airgapwidth=0.254
PolygonConnect [All] p2: connectstyle=Direct reliefconductorwidth=0.254 reliefentries=4 polygonreliefangle="90 Angle" airgapwidth=0.254
RoomDefinition main [InComponentClass('main')] p1: confinementstyle=ConfineIn formatcopy=TRUE lockcomponents=FALSE outline 124.968,-28.448 191.008,-28.448 191.008,-8.89 124.968,-8.89
RoutingVias [All] p1: holewidth=0.711 width=1.27 viastyle="Through Hole" minholewidth=0.711 minwidth=1.27 maxholewidth=0.711 maxwidth=1.27
SolderMaskExpansion [All] p1: expansion=0.102
Width [All] p1: maxlimit=5 minlimit=0.178 preferedwidth=0.254
27 further rules are at their usual default settings.

## Classes and differential pairs
differential pair LARGEIS: +LARGEIS_P -LARGEIS_N
differential pair IS2: +IS2_P -IS2_N
differential pair IS1: +IS1_P -IS1_N

## Components (designator, comment, footprint, x,y, rotation, side; value= is the part's Value field where it differs from the comment)
C1 "PA25V470M6x12" ElecCap_Hori#1 30.48,13.462 r0 top locked
C2 "PA25V470M6x12" ElecCap_Hori#2 21.59,13.589 r180 top locked
C3 "SH430V35R680D6x18" ElecCap_Hori#2 26.035,37.973 r270 top locked
C4 "PH35V330M8X12" CAP-8/3.5 21.209,42.926 r90 top
C5 "100nF (104) 10% 50V" 0402_C#1 27.94,17.272 r270 bottom
C6 "GRM155R61E475ME15D" 0402_C#1 23.241,15.24 r90 bottom
C7 "GRM1555C1H682JE01D" 0402_C#1 31.369,4.445 r180 bottom
C8 "100nF (104) 10% 50V" 0402_C#1 27.051,13.462 r270 bottom
C9 "10uF (106) 20% 10V" 0402_C#1 25.654,13.462 r270 bottom
C10 "CGA2B1X7R1V224KT000F" 0402_C#1 30.988,10.16 r270 bottom
C11 "GRM188R61E106KA73D" 0603_C#1 22.479,34.925 r0 top
C12 "TAJA226M016RNJ" CASE-A_3216 32.766,18.669 r270 bottom
C13 "GRM188R61E106KA73D" 0603_C#1 22.479,33.147 r0 top
C14 "GRM188R61E106KA73D" 0603_C#1 29.591,34.925 r180 top
C15 "C2012X5R1A476MTJ00E" 0805_C#1 42.037,12.446 r180 bottom
C16 "PH35V330M8X12" CAP-8/3.5 30.861,42.926 r90 top
C17 "CC0402JRNPO9BN681" 0402_C#1 31.369,7.239 r180 bottom
C18 "47nF (473) 10% 50V" 0402_C#1 31.369,8.509 r180 bottom
C19 "C3216X5R1V226MTJ00E" 1206C#1 14.732,40.005 r0 top
C20 "C3216X5R1V226MTJ00E" 1206C#1 14.732,42.037 r0 top
C21 "C3216X5R1V226MTJ00E" 1206C#1 37.211,40.132 r180 top
C22 "C3216X5R1V226MTJ00E" 1206C#1 37.211,42.164 r180 top
C23 "C3216X5R1V226MTJ00E" 1206C#2 28.702,42.799 r270 bottom
C24 "GMK325BJ226MM-P" 1210C 25.908,42.799 r270 bottom
C25 "GRM31CR61E476ME44L" 1206C#2 22.987,34.036 r270 bottom
C26 "GRM31CR61E476ME44L" 1206C#2 25.146,34.036 r270 bottom
C27 "GRM31CR61E476ME44L" 1206C#2 20.828,34.036 r270 bottom
C28 "GRM31CR61E476ME44L" 1206C#2 32.766,13.081 r90 bottom
C29 "GRM31CR61E476ME44L" 1206C#2 31.623,34.036 r270 bottom
C30 "GRM31CR61E476ME44L" 1206C#2 29.464,34.036 r270 bottom
C31 "GRM1555C1E103JE01D" 0402_C#1 26.924,6.858 r90 top
C32 "100nF (104) 10% 50V" 0402_C#1 19.177,20.828 r180 bottom
C33 "470pF (471) 10% 50V" 0402_C#1 19.177,19.431 r180 bottom
C34 "GRM188R61E106KA73D" 0603_C#2 16.51,28.702 r0 bottom
C35 "100nF (104) 10% 50V" 0402_C#1 16.383,23.114 r0 bottom
C36 "100nF (104) 10% 50V" 0402_C#1 20.701,9.271 r90 top
C37 "150nF (154) 10% 16V" 0402_C#1 27.686,4.699 r270 top
C38 "100nF (104) 10% 50V" 0402_C#1 20.828,3.81 r90 top
C39 "GRM188R61E106KA73D" 0603_C#2 39.497,30.226 r270 bottom
C40 "100nF (104) 10% 50V" 0402_C#1 34.544,27.94 r180 bottom
C41 "100nF (104) 10% 50V" 0402_C#1 40.894,27.94 r0 bottom
C42 "22uF (226) 20% 25V" 0805_C#2 35.179,18.796 r270 bottom
C43 "100nF (104) 10% 50V" 0402_C#1 34.29,6.604 r270 top
C44 "2.2uF (225) 10% 10V" 0402_C#1 33.909,11.557 r0 top
C45 "2.2uF (225) 10% 10V" 0402_C#1 32.893,9.779 r270 top
C46 "100nF (104) 10% 50V" 0402_C#1 43.561,23.368 r270 bottom
C47 "1nF (102) 10% 50V" 0402_C#1 45.339,28.194 r270 bottom
C48 "GRM1555C1H682JE01D" 0402_C#1 20.828,6.223 r0 bottom
C49 "100nF (104) 10% 50V" 0402_C#1 20.828,8.636 r0 bottom
C51 "C3216X5R1V226MTJ00E" 1206C#2 23.241,42.799 r270 bottom
C52 "C3216X5R1V226MTJ00E" 1206C#2 19.05,42.545 r270 bottom
C53 "C3216X5R1V226MTJ00E" 1206C#2 32.893,42.545 r270 bottom
C54 "C3216X5R1V226MTJ00E" 1206C#2 15.24,38.735 r0 bottom
C55 "4.7uF (475) 20% 16V" 0402_C#1 15.875,14.478 r90 bottom
C56 "1.0uF (105) 10% 25V" 0402_C#1 18.669,9.779 r270 bottom
C57 "GRM31CR61E476ME44L" 1206C#2 19.558,14.351 r90 bottom
C58 "C3216X5R1V226MTJ00E" 1206C#2 15.24,41.021 r0 bottom
C59 "GRM1555C1H102FA01D" 0402_C#1 47.625,24.13 r0 top
C60 "GRM1555C1H102FA01D" 0402_C#1 4.445,25.273 r0 top
C61 "10uF (106) 20% 10V" 0402_C#1 24.257,13.462 r270 bottom
C62 "CGA2B1X7R1V224KT000F" 0402_C#1 21.209,10.287 r270 bottom
C63 "10uF (106) 20% 10V" 0402_C#2 45.085,15.621 r270 bottom
C64 "10uF (106) 20% 10V" 0402_C#1 42.926,10.795 r90 top
C65 "GRM31CR61E476ME44L" 1206C#2 27.305,34.036 r270 bottom
C66 "C3216X5R1V226MTJ00E" 1206C#2 36.449,38.735 r180 bottom
C67 "C3216X5R1V226MTJ00E" 1206C#2 36.449,41.021 r180 bottom
C68 "GRM155R61E475ME15D" 0402_C#1 45.593,17.272 r0 bottom
C69 "100nF (104) 10% 50V" 0402_C#1 41.529,15.24 r90 bottom
C70 "22nF (223) 10% 50V" 0402_C#1 15.24,7.366 r270 top
C71 "10uF (106) 20% 10V" 0402_C#1 24.638,11.049 r0 top
C72 "4.7uF (475) 20% 16V" 0402_C#1 26.797,12.446 r180 top
C73 "GRM188R61E106KA73D" 0603_C#1 29.591,33.147 r180 top
C74 "100nF (104) 10% 50V" 0402_C#1 14.732,14.478 r90 bottom
C75 "10uF (106) 20% 10V" 0402_C#1 41.275,10.795 r90 top
D1 "BAS100CS-AU_R1_000A1" SOD-323#1 27.432,9.652 r180 top
D2 "BAS100CS-AU_R1_000A1" SOD-323#1 23.114,9.398 r270 top
D3 "1N4148WS T4" SOD-323#1 32.512,23.241 r270 bottom
D4 "BAV70W A4" SC70-3 34.417,9.017 r180 bottom
D5 "XL-1608BGWC-06" LED-0402 46.355,20.574 r90 bottom
D6 "PT30L80SP" TO277 26.035,33.401 r0 top
D7 "B5819WS S4" SOD-323#2 33.909,30.607 r90 bottom
D8 "1N4148WS T4" SOD-323#3 37.973,8.382 r90 bottom
D9 "XL-1608BGWC-06" LED-0402 35.941,7.112 r0 bottom
D10 "RLSD32A051V" SOD-323#1 43.053,12.7 r0 top
FB1 "MAF1005GAD352AT000" 0402_L 16.383,21.717 r180 bottom
FB2 "EBMS100505A050" 0402_L 32.512,28.321 r270 bottom
FB3 "EBMS100505A050" 0402_L 45.593,18.796 r180 bottom
L1 "XAL1580-102ME" XAL1580_xxxME 38.1,24.511 r90 top locked
L2 "XAL1580-102ME" XAL1580_xxxME 13.97,24.511 r90 top locked
L3 "ZEMS252012-220M" SWPA252010S 30.861,17.399 r180 bottom
L4 "ZEMS252012-220M" SWPA252010S 43.307,14.097 r90 bottom
Q1 "INN100EBD018DAD" EN-FCLGA-8_L6.0-W5.0-P1.27-BL-EP 18.034,35.687 r0 top
Q2 "INN100EA035EAD" FCLGA-8_L3.3-W3.3_INN100EA070DAD 39.37,34.036 r270 top locked
Q3 "INN100EBD018DAD" EN-FCLGA-8_L6.0-W5.0-P1.27-BL-EP 33.909,35.687 r0 top
Q4 "INN100EA035EAD" FCLGA-8_L3.3-W3.3_INN100EA070DAD 43.18,34.036 r270 top
Q5 "IAUCN04S7L004ATMA1" SON/DFN5x6(MOS) 10.668,17.653 r270 bottom
Q6 "INN100EA035EAD" FCLGA-8_L3.3-W3.3_INN100EA070DAD 10.033,34.036 r270 top
Q7 "INN100EA035EAD" FCLGA-8_L3.3-W3.3_INN100EA070DAD 13.843,34.036 r270 top locked
R1 "ASR-M-3-0.75F" 2512-Virtual4Wire 33.528,14.605 r0 top
R2 "ASR-M-3-0.75F" 2512-Virtual4Wire 12.192,14.732 r0 top
R3 "1Ω (1R00) ±1%" 0402_R 23.241,17.399 r90 bottom
R4 "16.2KΩ (1622) ±1%" 0402_R 35.179,15.875 r0 bottom
R5 "2KΩ (2001) ±1%" 0402_R 35.179,14.478 r0 bottom
R6 "1.5Ω (1R50) ±1%" 0402_R 43.942,30.734 r90 bottom
R7 "PTFR0402B51R0N9" 0402_R 31.369,5.842 r180 bottom
R8 "0.5Ω (0R50) ±1%" 0402_R 45.339,30.734 r90 bottom
R9 "1.5Ω (1R50) ±1%" 0402_R 41.148,30.734 r90 bottom
R10 "0.5Ω (0R50) ±1%" 0402_R 42.545,30.734 r90 bottom
R11 "RT0402BRD0720KL" 0402_R 28.702,6.477 r0 top
R12 "4.7KΩ (4701) ±1%" 0402_R 12.954,22.606 r90 bottom
R13 "MCSM2512DR001K9" 2512-Virtual4Wire 9.779,29.083 r270 bottom
R14 "RT0402BRD07130KL" 0402_R 28.702,2.921 r0 top
R15 "1.2KΩ (1201) ±1%" 0402_R 31.877,4.191 r270 top
R16 "1.2MΩ (1204) ±1%" 0402_R 26.289,4.699 r270 top
R17 "AT0402BRD0791KL" 0402_R 29.083,4.699 r90 top
R18 "10KΩ (1002) ±1%" 0402_R 38.862,27.94 r0 bottom
R19 "10KΩ (1002) ±1%" 0402_R 34.417,23.876 r270 bottom
R20 "RE0402BRF07820KL" 0402_R 32.512,26.162 r90 bottom
R21 "AR02BTD4703" 0402_R 37.211,26.162 r90 bottom
R22 "ERA2AEB104X" 0402_R 34.417,26.162 r270 bottom
R23 "RT0402BRD0756KL" 0402_R 35.814,26.162 r270 bottom
R24 "20KΩ (2002) ±1%" 0402_R 35.687,11.176 r270 top
R25 "20KΩ (2002) ±1%" 0402_R 34.29,9.779 r270 top
R26 "10KΩ (1002) ±1%" 0402_R 36.703,22.225 r180 bottom
R27 "10KΩ (1002) ±1%" 0402_R 43.561,20.701 r90 bottom
R28 "1KΩ (1001) ±1%" 0402_R 33.782,4.699 r0 top
R29 "RC0402DR-07330KL" 0402_R 43.561,25.654 r270 bottom
R30 "FNTC0402X104D4250DB" 0402_R 46.736,28.194 r270 bottom
R31 "2KΩ (2001) ±1%" 0402_R 44.831,20.701 r90 bottom
R32 "4.7KΩ (4701) ±1%" 0402_R 18.669,7.493 r270 bottom
R33 "ERA2AEB912X" 0402_R 28.702,7.62 r0 top
R34 "AR02BTD4703" 0402_R 36.703,27.94 r180 bottom
R35 "RT0402BRD0782K5L" 0402_R 29.21,3.81 r0 bottom
R36 "5.1Ω (5R10) ±1%" 0603_R 47.498,26.543 r270 top
R37 "5.1Ω (5R10) ±1%" 0603_R 4.572,27.686 r270 top
R38 "91KΩ (9102) ±1%" 0402_R 27.051,3.81 r180 bottom
R39 "0Ω (0R0) ±1%" 0402_R 24.892,3.81 r0 bottom
R40 "0Ω (0R0) ±1%" 0402_R 22.86,3.81 r180 bottom
R41 "RN73R1ETTP2703B25" 0402_R 20.955,4.445 r270 bottom
R42 "TC0250B1203TCC" 0402_R 19.177,18.034 r180 bottom
R43 "PTFR0402B51R0N9" 0402_R 20.828,7.493 r180 bottom
R44 "1.5Ω (1R50) ±1%" 0402_R 19.177,31.496 r90 bottom
R45 "0.5Ω (0R50) ±1%" 0402_R 17.78,31.496 r90 bottom
R46 "1.5Ω (1R50) ±1%" 0402_R 12.573,31.496 r90 bottom
R47 "0.5Ω (0R50) ±1%" 0402_R 13.97,31.496 r90 bottom
R48 "4.7Ω (4R70) ±1%" 0402_R 24.765,9.271 r90 top
R49 "4.7Ω (4R70) ±1%" 0402_R 26.797,11.049 r0 top
R50 "RT0402BRD07127KL" 0402_R 40.132,15.24 r270 bottom
R51 "PTFR0402B24K3N9" 0402_R 40.132,18.415 r90 bottom
R52 "7.5KΩ (7501) ±1%" 0402_R 39.37,8.89 r90 bottom
R53 "20KΩ (2002) ±1%" 0402_R 40.894,10.16 r270 bottom
R54 "10KΩ (1002) ±1%" 0402_R 33.782,7.112 r180 bottom
R55 "10KΩ (1002) ±1%" 0402_R 33.782,5.969 r180 bottom
U1 "LTC7892AUJM#WTRPBF" UJM0040A 25.908,8.001 r90 bottom locked
U2 "LGS5148" SOT95P245X110-6N 25.654,16.51 r90 bottom
U3 "UCC27614DSGR" DSG0008A 15.038,16.925 r0 bottom
U4 "TPS7B6950QDBVRQ1" SOT95P245X110-5N 16.51,25.781 r90 bottom locked
U5 "INA214AIDCKR" SC70-6 17.653,7.112 r180 top locked
U6 "OPA388IDBVR" SOT95P245X110-5N 23.622,4.318 r180 top
U7 "TPS7B6950QDBVRQ1" SOT95P245X110-5N 36.576,30.353 r0 bottom
U8 "CMS8S6990NA-QFN20" QFN40P300X300X800_HS-21N 40.513,24.765 r270 bottom locked
U9 "OPA333AIDCKT" SC70-5 32.385,6.985 r270 top
U10 "CH412K" SC70-6 40.64,20.701 r0 bottom locked
U11 "LMV321IDCKR" SC70-5 17.653,9.906 r0 top
U12 "LGS5148" SOT95P245X110-6N 42.672,17.907 r0 bottom locked

## Footprints (in the part's own frame and the unit in brackets; to place one, negate y for a bottom-side part, rotate by r counter-clockwise, add the part's x,y. Pads: shape width x height; smd on the part's side, far side on the other; paste and mask are expansions set on the pad)
0402_C#1 [mm]
  rect 0.6x0.65 smd mask+0.051: 1(-0.425,0) 2(0.425,0)
  silkscreen extent -0.97,-0.58 0.97,0.58, body extent -0.48,-0.3 0.52,0.3, height 0.2
0402_C#2 [mm]
  rect 0.6x0.65 smd mask+0.02: 1(-0.425,0) 2(0.425,0)
  silkscreen extent -0.97,-0.58 0.97,0.58, body extent -0.48,-0.3 0.52,0.3, height 0.2
0402_L [mm]
  rect 0.6x0.65 smd mask+0.051: 1(-0.425,0) 2(0.425,0)
  silkscreen extent -0.97,-0.58 0.97,0.58, body extent -0.51,-0.26 0.54,0.26, height 0.36
0402_R [mm]
  rect 0.6x0.65 smd mask+0.051: 1(-0.425,0) 2(0.425,0)
  silkscreen extent -0.97,-0.58 0.97,0.58, body extent -0.57,-0.27 0.58,0.28, height 0.41
0603_C#1 [mm]
  rect 0.8x0.98 smd: 1(-0.77,0) 2(0.77,0)
  silkscreen extent -1.53,-0.79 1.54,0.79, body extent -0.8,-0.4 0.8,0.4, height 0.3
0603_C#2 [mm]
  rect 0.93x0.98 smd: 1(-0.77,0) 2(0.77,0)
  silkscreen extent -1.53,-0.79 1.54,0.79, body extent -0.8,-0.4 0.8,0.4, height 0.3
0603_R [mm]
  rect 0.93x0.98 smd: 1(-0.77,0) 2(0.77,0)
  silkscreen extent -1.53,-0.79 1.54,0.79, body extent -0.85,-0.4 0.85,0.4, height 0.56
0805_C#1 [mm]
  rect 1x1.47 smd mask+0.01: 1(-0.89,0) 2(0.89,0)
  silkscreen extent -1.77,-1.04 1.77,1.04, body extent -1,-0.62 1,0.63, height 0.77
0805_C#2 [mm]
  rect 1.16x1.47 smd: 1(-0.89,0) 2(0.89,0)
  silkscreen extent -1.77,-1.04 1.77,1.04, body extent -1,-0.62 1,0.62, height 0.77
1206C#1 [mil]
  rect 47.24x60 smd: 1(-65,0)
  rect 50x60 smd: 2(65,0)
  silkscreen extent 0,-30 0,30, body extent -63,-31 63,31, height 37
1206C#2 [mil]
  rect 50x60 smd: 1(-65,0) 2(65,0)
  silkscreen extent 0,-30 0,30, body extent -63,-31 63,31, height 37
1210C [mil]
  rect 60x100 smd: 1(-65,0) 2(65,0)
  silkscreen extent 0,-50 0,50, body extent -63,-49 63,49, height 98
2512-Virtual4Wire [mm] "2512 Shunt Resistor Virtual 4Wire Connection"
  rect 1.65x2.5 smd mask+0.05: 0(0,0.1) 1(6.401,0.1)
  rect 1.65x0.4 smd mask+0.05: 2(0,-1.6) 3(6.401,-1.6)
  silkscreen extent -1.09,-2.28 7.49,1.78, body extent 0,-1.78 6.48,1.4, height 1
CAP-8/3.5 [mil]
  oct 70x70 / inner round 70 / far side oct 55.12x55.12 hole 34: 1(-68.9,0)
  round 70 / inner round 70 / far side round 55.12 hole 34: 2(68.9,0)
  silkscreen extent -150,-150 150,150
CASE-A_3216 [mm]
  rect 1.8x1.35 smd: 1(1.31,0) 2(-1.31,0)
  silkscreen extent -2.54,-1 2.97,1, body extent -1.7,-0.84 1.7,0.84, height 1.71
DSG0008A [mm] "SON, 8-Leads, Body 2.00x2.00mm, Pitch 0.50mm, Thermal Pad 1.60x0.69mm, IPC Medium Density"
  rect 0.8x0.3 smd mask+0.02: 1(-0.945,0.75) 2(-0.945,0.25) 3(-0.945,-0.25) 4(-0.945,-0.75) 5(0.945,-0.75) 6(0.945,-0.25) 7(0.945,0.25) 8(0.945,0.75)
  rect 0.69x1.6 smd mask+0.02: 9(0,0)
  silkscreen extent -1.5,-1.2 1.05,1.25, body extent -1.05,-1.05 1.05,1.05, height 0.8
ElecCap_Hori#1 [mm] "ˮƽ��װ�ĵ��� 6x12mm"
  oct 1.5x1.5 hole 0.85 mask+0.03: 1(0,1.27)
  round 1.5 hole 0.85 mask+0.03: 2(0,-1.27)
  silkscreen extent 0,-3.05 1.4,-2.16
ElecCap_Hori#2 [mm] "ˮƽ��װ�ĵ��� 6x12mm"
  oct 1.5x1.5 hole 0.85 mask+0.03: 1(0,-1.27)
  round 1.5 hole 0.85 mask+0.03: 2(0,1.27)
  silkscreen extent 0,2.16 1.4,3.05
EN-FCLGA-8_L6.0-W5.0-P1.27-BL-EP [mil]
  rect 22.8x42.5 smd paste-3937 mask+2: 1(-75,-111.5) 2(-25,-111.5) 3(25,-111.5) 4(75,-111.5) 5(74.8,111.6) 6(25.2,111.6) 7(-24.8,111.6) 8(-74.8,111.6)
  rect 37.4x19.7 smd paste-3937 mask+2: 8(-85.4,-18.3) 8(85.4,-18.3)
  rect 181.1x161.4 smd paste-3937 mask+2: 8(0,27.4)
  silkscreen extent -102,-114 102,114, body extent -105,-115 105,115, height 43
FCLGA-8_L3.3-W3.3_INN100EA070DAD [mm]
  round 0.579 smd: 1(-1.006,-0.693)
  rect 0.45x0.899 smd: 2(0.015,0.61)
  rect 0.2x2 smd mask+0.03: 3(0.889,-0.635)
  Top Layer region: 0.765,0.597 1.064,0.597 1.064,0.536 1.364,0.536 1.364,0.234 1.064,0.234 1.064,-0.114 1.364,-0.114 1.364,-0.414 1.064,-0.414 1.064,-0.765 1.364,-0.765 1.364,-1.064 1.064,-1.064 1.064,-1.415 1.364,-1.415 1.364,-1.714 1.064,-1.714 1.064,-1.775 0.765,-1.775
  Top Layer region: -2.139,0.538 -1.585,0.538 -1.585,0.574 -0.95,0.574 -0.95,0.986 -0.65,0.986 -0.65,-0.114 0.015,-0.114 0.015,-1.796 -0.65,-1.796 -0.65,-2.164 -0.95,-2.164 -0.95,-1.796 -0.952,-1.793 -1.585,-1.793 -1.585,-1.715 -2.136,-1.715 -2.136,-1.415 -1.585,-1.415 -1.585,-1.064 -2.136,-1.064 -2.136,-0.765 -1.585,-0.765 -1.585,-0.414 -2.136,-0.414 -2.136,-0.114 -1.585,-0.114 -1.585,0.234 -2.136,0.234
  silkscreen extent -2.59,-2.24 1.26,1.06, body extent -2.03,-2.29 1.27,1.02, height 1
LED-0402 [mm]
  rect 0.651x0.6 smd mask+0.03: A(-0.55,0) K(0.55,0)
  silkscreen extent -0.8,-0.51 1.14,0.51, body extent -0.55,-0.51 0.59,0.51, height 1
QFN40P300X300X800_HS-21N [mm] "QFN, 20-Leads, Body 3.00x3.00mm, Pitch 0.40mm, Thermal Pad 1.65x1.65mm, IPC Medium Density"
  oval 0.85x0.2 smd mask+0.03: 1(-1.525,0.8) 2(-1.525,0.4) 3(-1.525,0) 4(-1.525,-0.4) 5(-1.525,-0.8) 11(1.525,-0.8) 12(1.525,-0.4) 13(1.525,0) 14(1.525,0.4) 15(1.525,0.8)
  oval 0.2x0.85 smd mask+0.03: 6(-0.8,-1.525) 7(-0.4,-1.525) 8(0,-1.525) 9(0.4,-1.525) 10(0.8,-1.525) 16(0.8,1.525) 17(0.4,1.525) 18(0,1.525) 19(-0.4,1.525) 20(-0.8,1.525)
  rect 1.65x1.65 smd mask+0.03: 21(0,0)
  silkscreen extent -2.16,-1.7 1.7,2.29, body extent -1.55,-1.55 1.55,1.55, height 0.8
SC70-3 [mm] "3 Lead SC70(SOT-323) package for small Transistor"
  rect 0.9x0.4 smd mask+0.05: 1(-1.125,0.65) 2(-1.125,-0.65) 3(1.125,0)
  silkscreen extent -2.16,-1.1 0.3,1.1, body extent -0.67,-1.1 0.67,1.1, height 1.1
SC70-5 [mm] "SOT23, 6-Leads, Body 2.00x2.10mm, Pitch 0.65mm, IPC Medium Density"
  rect 0.9x0.4 smd mask+0.05: 1(-1.125,0.65) 2(-1.125,0) 3(-1.125,-0.65) 4(1.125,-0.65) 5(1.125,0.65)
  silkscreen extent -1.25,-1.1 0.3,1.53, body extent -0.67,-1.1 0.67,1.1, height 1.1
SC70-6 [mm] "SOT23, 6-Leads, Body 2.00x2.10mm, Pitch 0.65mm, IPC Medium Density"
  rect 0.9x0.4 smd mask+0.05: 1(-1.125,0.65) 2(-1.125,0) 3(-1.125,-0.65) 4(1.125,-0.65) 5(1.125,0) 6(1.125,0.65)
  silkscreen extent -1.9,-1.1 0.3,1.39, body extent -0.67,-1.1 0.67,1.1, height 1.1
SOD-323#1 [mm]
  rect 1x0.83 smd: 1(1.18,0) 2(-1.18,0)
  silkscreen extent -0.4,-0.6 0.4,0.6, body extent -1.35,-0.62 1.35,0.62, height 1.1
SOD-323#2 [mm]
  rect 0.813x0.83 smd: 1(1.18,0) 2(-1.18,0)
  silkscreen extent -0.4,-0.6 0.4,0.6, body extent -1.35,-0.62 1.35,0.62, height 1.1
SOD-323#3 [mm]
  rect 0.8x0.83 smd mask+0.01: 1(1.18,0) 2(-1.18,0)
  silkscreen extent -0.4,-0.6 0.4,0.6, body extent -1.35,-0.62 1.35,0.62, height 1.1
SON/DFN5x6(MOS) [mm] "SON, 8-Leads, Body 5.00x6.00mm, Pitch 1.27mm, Thermal Pad 4.00x3.53mm, IPC Low Density"
  rect 1.15x0.45 smd: 1(-2.86,1.905) 2(-2.86,0.635) 3(-2.86,-0.635) 4(-2.86,-1.905) 5(2.86,-1.905) 6(2.86,-0.635) 7(2.86,0.635) 8(2.86,1.905)
  Top Layer region: -1.143,2.159 3.048,2.159 3.048,-2.159 -1.143,-2.159
  silkscreen extent -3.65,-2.7 3.2,2.75, body extent -3.05,-2.55 3.05,2.55, height 1.05
SOT95P245X110-5N [mm] "SOT23, 5-Leads, Body 2.90x2.45mm, Pitch 0.95mm, IPC Medium Density"
  rect 1x0.6 smd: 1(-1.2,0.95) 2(-1.2,0) 3(-1.2,-0.95) 4(1.2,-0.95) 5(1.2,0.95)
  silkscreen extent -2.41,-1.5 0.3,1.5, body extent -0.7,-1.5 0.7,1.5, height 1.1
SOT95P245X110-6N [mm] "SOT23, 6-Leads, Body 2.90x2.45mm, Pitch 0.95mm, IPC Medium Density"
  rect 1x0.6 smd mask+0.03: 1(-1.2,0.95) 2(-1.2,0) 3(-1.2,-0.95) 4(1.2,-0.95) 5(1.2,0) 6(1.2,0.95)
  silkscreen extent -1.32,-1.5 0.3,1.93, body extent -0.7,-1.5 0.7,1.5, height 1.1
SWPA252010S [mm] "С�����ߵ��"
  rect 0.85x2 smd mask+0.03: 1(0,0) 2(1.65,0)
  silkscreen extent 0.51,-0.89 1.14,0.89, body extent -0.13,-1.02 1.78,1.02, height 3.06
TO277 [mm]
  rect 3.2x3.7 smd mask+0.03: 1(0,0)
  rect 2x0.9 smd mask+0.03: 1(0,2.275)
  rect 1.1x0.9 smd mask+0.03: 2(-0.9,-3.65) 3(0.9,-3.65)
  silkscreen extent -2,-3.09 2,2.29, body extent -2.03,-3.05 2.03,2.29, height 1.1
UJM0040A [mm] "QFN, 40-Leads, Body 5.95x5.95mm, Pitch 0.50mm, Thermal Pad 4.10x4.10mm, IPC Medium Density"
  oval 0.9x0.25 smd mask+0.01: 1(-2.95,2.25) 2(-2.95,1.75) 3(-2.95,1.25) 4(-2.95,0.75) 5(-2.95,0.25) 6(-2.95,-0.25) 7(-2.95,-0.75) 8(-2.95,-1.25) 9(-2.95,-1.75) 10(-2.95,-2.25) 21(2.95,-2.25) 22(2.95,-1.75) 23(2.95,-1.25) 24(2.95,-0.75) 25(2.95,-0.25) 26(2.95,0.25) 27(2.95,0.75) 28(2.95,1.25) 29(2.95,1.75) 30(2.95,2.25)
  oval 0.25x0.9 smd mask+0.01: 11(-2.25,-2.95) 12(-1.75,-2.95) 13(-1.25,-2.95) 14(-0.75,-2.95) 15(-0.25,-2.95) 16(0.25,-2.95) 17(0.75,-2.95) 18(1.25,-2.95) 19(1.75,-2.95) 20(2.25,-2.95) 31(2.25,2.95) 32(1.75,2.95) 33(1.25,2.95) 34(0.75,2.95) 35(0.25,2.95) 36(-0.25,2.95) 37(-0.75,2.95) 38(-1.25,2.95) 39(-1.75,2.95) 40(-2.25,2.95)
  rect 4.1x4.1 smd mask+0.01: 41(0,0)
  silkscreen extent -3.15,-3.15 3.15,3.94, body extent -3,-3 3,3, height 0.75
XAL1580_xxxME [mm] "ColiCraft XAL1580Series Inductor"
  rect 3.18x13.2 smd mask+0.03: 1(-5.3,0) 2(5.3,0)
  silkscreen extent -7.6,-8.2 7.6,8.2, body extent -7.62,-8.25 7.62,8.25, height 8

## Part data
C1 C2: library part CAP2, "直插固态电容，耐压25V容量470uF，尺寸D6.3x12"
C3: library part CAP2, "升阳电子 直插特殊尺寸固态电容 680uF ±20% 35V 直径63mm长度18mm 2000Hr@105℃"
C4 C16: library part CAP2, "125°C 5000Hrs 高温耐受直插固态电容。耐压35V容量330uF，尺寸D8mmxL12mm"
C5 C8 C18 C32 C35 C36 C37 C38 C40 C41 C43 C46 C49 C69 C74: library part "0402 100nF (104) 10% 16V", "贴片电容"
C6 C68: library part "0402 1.0uF (105) 10% 25V", "0402贴片MLCC电容 4.7uF±20% 25V X5R"
C7 C48: library part "0402 1nF (102) 10% 50V", "0402贴片MLCC电容 6.8nF±5% 50V C0G/NP0"
C9 C61 C71: library part "0402 10uF (106) 20% 6.3V", "贴片电容"
C10 C62: library part "0402 220nF (224) 10% 16V", "车规级 0402贴片MLCC电容 35V 220nF±10% X7R"
C11 C13 C14 C34 C39 C73: library part "0603 10uF (106) 10% 10V", "贴片MLCC电容 25V 10uF±20% X5R"
C12: library part "3216 10uF (106) 10% 16V", "1206钽电容，22uF (226) ±10% 16V"
C15: library part "0805 22uF (226) 20% 25V", "贴片MLCC电容，X5R 47uF ±20% 10V"
C17: library part "0402 1nF (102) 10% 50V", "0402贴片MLCC电容 NP0材质 680pF ±5% 50V"
C19 C20 C21 C22 C23 C51 C52 C53 C54 C58 C66 C67: library part Cap, "TDK MLCC电容 X5R 35V 22uF±20%"
C24: library part Cap, "1210 MLCC电容 35V 22uF ±20% X5R"
C25 C26 C27 C28 C29 C30 C57 C65: library part Cap, "1206尺寸村田MLCC 25V 47uF X5R ±20%"
C31: library part "0402 6.8nF (682) 10% 50V", "0402贴片MLCC电容 10nF±5% 25V C0G/NP0"
C33: library part "0402 470pF (471) 10% 50V", "贴片电容"
C42: library part "0805 22uF (226) 20% 25V", "贴片电容"
C44 C45 C55 C56 C72: library part "0402 1.0uF (105) 10% 25V", "贴片电容"
C47: library part "0402 1nF (102) 10% 50V", "贴片电容"
C59 C60: library part "0402 1nF (102) 10% 50V", "村田0402贴片MLCC电容 1nF ±1% 50V C0G"
C63 C64 C75: library part "0402 4.7uF (475) 20% 10V", "贴片电容"
C70: library part "0402 10nF (103) 10% 50V", "贴片电容"
D1 D2 D3 D7 D8: library part "SOD-323 1N4148WS T4", "二极管"
D4: library part "SOT-23 BAV70 A4", "开关二极管"
D5 D9: library part LED0402, "0603(1608)贴片冰蓝色发光二极管 2.7-3.4V 20mA"
D6: library part SB2045L, "30A 80V 肖特基二极管"
D10: library part "SOD-323 1N4148WS T4", "单向TVS二极管 5V工作电压 峰值脉冲电流：21A@8/20us"
FB1: library part "0402 12nH  5%", "贴片铁氧体磁珠 270mA 500R@100MHz"
FB2 FB3: library part "0402 12nH  5%", "贴片磁珠 200mA 5R±25% 100MHz"
L1 L2: library part "Inductor Iron", "线艺XAL系列电感"
L3 L4: library part "Inductor Iron", "一体成型TCORE热压功率电感 2.5x2.0mm尺寸 1.0mm高度 22uH 0.78Ω 1.2A"
Q1 Q3: library part "SON/DFN5x6 MOS", "基于先进GaN技术的100V硅基氮化镓增强型HEMT晶体管，采用En-FCLGA 5mm x 6mm 封装。"
Q2 Q4 Q6 Q7: library part INN100EA035A-C, "100V Enhancement-mode GaN Power Transistor, 2.7mΩ Gen3.5"
Q5: library part "SON/DFN5x6 MOS", "0.44mΩ 40V 逻辑电平 OptiMOS 7 车规级MOSFET"
R1 R2: library part shunt, "业展ASR系列精密检流电阻，2512 0.75mΩ±1% 锰铜材质 <50ppm/K P70℃=5W"
R3 R6 R8 R9 R10 R44 R45 R46 R47 R48 R49: library part "0402 1Ω (1R00) 1%", "贴片电阻"
R4 R5 R12 R18 R19 R24 R26 R27 R54 R55: library part "0402 10KΩ (1002) 1%", "贴片电阻"
R7 R43: library part "0402 10Ω (10R0) 1%", "0402高精密低温飘薄膜贴片电阻 51Ω ±0.1% 62.5mW 25PPM"
R11: library part "0402 20KΩ (2002) 1%", "0402贴片薄膜高精密电阻 20KΩ ±0.1% 62.5mW 25PPM"
R13: library part shunt, "精密低温漂束焊模压合金检流电阻 车规级别 1.0mΩ ±0.5% 3W"
R14: library part "0402 100KΩ (1003) 1%", "0402贴片薄膜高精密电阻 130KΩ ±0.1% 62.5mW 25PPM"
R15: library part "0402 470Ω (4700) 1%", "贴片电阻"
R16: library part "0402 1MΩ (1004) 1%", "贴片电阻"
R17: library part "0402 100KΩ (1003) 1%", "0402贴片薄膜高精密电阻 91KΩ ±0.1% 62.5mW 25PPM"
R20: library part "0402 680Ω (6800) 1%", "0402精密低温飘贴片电阻 820K±0.1% 62.5mW"
R21: library part "0402 470KΩ (4703) 1%", "0402 贴片薄膜高精密低温飘电阻 470KΩ±0.1% 25PPM"
R22: library part "0402 100KΩ (1003) 1%", "松下 0402精密低温飘贴片电阻 100±0.1% 62.5mW"
R23: library part "0402 100KΩ (1003) 1%", "0402薄膜贴片高精密电阻 56K±0.1% 62.5mW"
R25 R32 R53: library part "0402 20KΩ (2002) 1%", "贴片电阻"
R28: library part "0402 1KΩ (1001) 1%", "贴片电阻"
R29: library part "0402 330KΩ (3303) 1%", "0402厚膜较高精度贴片电阻 330KΩ±0.5% 62.5mW"
R30: library part "0402 100KΩ (1003) 1%", "0402尺寸贴片式NTC热敏电阻 B25-85℃=4310±0.5% R25=100KΩ±0.5%"
R31: library part "0402 2KΩ (2001) 1%", "贴片电阻"
R33: library part "0402 10KΩ (1002) 1%", "松下高精密0402贴片薄膜电阻 9.1KΩ ±0.1% 62.5mW 5PPM"
R34: library part "0402 10KΩ (1002) 1%", "0402 贴片薄膜高精密低温飘电阻 470KΩ±0.1% 25PPM"
R35: library part "0402 100KΩ (1003) 1%", "薄膜低温飘高精密电阻 82.5KΩ (8242) ± 0.1% 25PPM"
R36 R37: library part "0603 2.2Ω (2R20) 1%", "贴片电阻"
R38: library part "0402 100KΩ (1003) 1%", "贴片电阻"
R39 R40: library part "0402 0Ω (0R0) 1%", "贴片电阻"
R41: library part "0402 200KΩ (2003) 1%", "KOA RN73系列0402贴片薄膜高精密电阻 270KΩ±0.1% 62.5mW ±25PPM"
R42: library part "0402 120KΩ (1203) 1%", "镍铬薄膜高精密0402贴片电阻 120KΩ ±0.1% 25PPM"
R50: library part "0402 27KΩ (2702) 1%", "精密高稳定性0402贴片电阻 127KΩ ±0.1% 25PPM"
R51: library part "0402 4.7KΩ (4701) 1%", "高精密高稳定性0402贴片电阻 24.3KΩ ±0.1% 5PPM"
R52: library part "0402 8.2KΩ (8201) 1%", "贴片电阻"
U1: library part LTC7892RUJM, "Low IQ  , Dual, 2-Phase Synchronous Boost Controller for GaN FETs, AEC-Q100 Certified"
U2 U12: "48V输入，600mA同步降压转换器，SOT-23-6封装"
U3: "10A峰值电流驱动能力的单路低侧栅极驱动器，17.5nS典型传播延迟，WSON8封装"
U4 U7: library part TPS7B6933DBVR, "150mA 40V max input Ultra low Iq LDO,fixed   5V output AECQ100 Qualified"
U5: library part INA199A2DCKR, "100V/V增益 26V最高共模电压，高低测通用双向高精度检流放大器 SC70-6封装"
U6: library part TLV333IDBVR, "单路、10MHz、CMOS、零温漂、零交叉、真 RRIO 精密运算放大器"
U8: library part CM8S6990NA-QFN20, "增强型闪存1T 8051单片机，16KB Flash 256+1K XRAM"
U9: library part LMV321IDCKR, "微功耗、1.8V、17uA 零漂移 CMOS 精密运算放大器"
U10: "very low capacity quad IO ESD protection Array"
U11: "CMOS超小型运算放大器，SC70-5"

## Free pads (board coordinates)
  round 1 smd far side mask+0.03: 0(45.339,22.606) 1(45.339,25.146) 2(45.339,23.876)
  round 1.5 hole 1 mask+0.03: 2(9.144,34.798) 2(11.778,11.599) 2(12.954,34.798) 2(38.481,34.798) 2(42.291,34.798)
  oct 1x1 smd far side mask+0.03: 2(45.339,26.416)
  rect 6x5 hole 3 mask+0.03: 4(26.025,24.628)
  round 1.5 smd mask+0.03: 4(36.449,6.985) 4(37.211,9.652) 4(38.481,8.128) 4(39.878,9.652)
  round 3 smd mask+0.03: 5(26.025,45.72) 6(12.446,8.382)
  rect 10x10 smd far side mask+0.05: 6(26.025,24.228)

## Via types
v1: diameter 0.457, hole 0.254, Top Layer to Bottom Layer, tented both sides, 1318 vias

## Nets (pads, with @x,y where several pads share a name; then routed paths per layer and width w, separated by ;. In a path a pad name is that pad's centre, name@x,y a point inside that pad or via, vN(x,y) a via of type N, cw(c..) or ccw(c..) an arc to the next point about the centre after c; other vN are vias at no path point)
5VFB: C34.2 C36.2 C38.1 C49.2 U1.13 U4.5 U5.3 U6.5 U11.5 | length 40.7
  Top Layer w0.254: v1(18.542,11.176) 20.026,11.176 20.701,10.501 C36.2@20.701,9.696 20.11,9.696 19.939,9.525 ; U5.3@18.778,7.762 19.446,7.762 19.579,7.895 19.579,8.382 19.939,8.742 19.939,9.525 ; U11.5@18.778,10.556 19.543,10.556 19.939,10.16 19.939,9.525
  Top Layer w0.381: v1(20.066,4.064) 20.066,3.81 20.491,3.385 22.405,3.385 U6.5@22.422,3.368
  Signal Layer 3 w0.381: v1(13.97,27.305) 14.478,26.797 14.478,19.558 17.383,16.653 17.383,12.335 v1(18.542,11.176)
  Bottom Layer w0.203: C49.2@21.253,8.636 21.253,8.592 21.717,8.128 v1(21.971,8.128) 21.971,7.239 22.459,6.751 U1.13@22.958,6.751
  Bottom Layer w0.381: v1(13.97,27.305) 13.97,29.337 14.351,29.718 17.018,29.718 17.28,29.456 C34.2@17.28,28.702 17.28,27.866 17.46,27.686 U4.5@17.46,26.981 ; C49.2@21.253,8.592 C49.2@21.297,8.636
6V0: C8.2 C12.1 C42.2 C55.1 C72.2 C74.1 FB1.1 L3.1 R4.1 U1.26 U1.27 U3.6 U3.7
  other v1: 26.416,11.938 26.416,12.446 26.416,12.954 16.129,14.097 34.798,16.637 35.306,16.637 34.798,17.145 35.306,17.145 16.764,21.717
12V: C1.1 C2.1 C11.2 C13.2 C14.2 C25.2 C26.2 C27.2 C28.2 C29.2 C30.2 C57.2 C65.2 C73.2 D6.2 D6.3 D7.1 FB3.2 pad.4@26.025,24.628 pad.6@26.025,24.228 R1.0 R2.1 R3.2 R20.2 | length 28
  Signal Layer 3 w0.381: 33.655,15.24 36.068,15.24 39.624,18.796 v1(45.168,18.796)
  Bottom Layer w0.305: R3.2@23.241,17.824 v1(23.241,21.844) ; pad.6@26.025,24.228 28.384,26.587 R20.2@32.512,26.587
  Bottom Layer w0.381: 30.734,31.75 30.771,31.787 D7.1@33.909,31.787 ; C29.2@30.861,32.385 C29.2@31.078,32.168
  other v1: 33.147,14.097 33.655,14.097 31.623,14.351 32.131,14.351 32.639,14.351 33.147,14.605 33.655,14.605 31.623,14.859 32.131,14.859 32.639,14.859 20.447,15.367 31.623,15.367 32.131,15.367 20.32,15.875 20.828,15.875 21.336,15.875 20.32,16.383 20.828,16.383 22.733,20.32 23.241,20.32 23.749,20.32 24.257,20.32 24.765,20.32 25.273,20.32 25.781,20.32 26.289,20.32 26.797,20.32 27.305,20.32 27.813,20.32 28.321,20.32 28.829,20.32 29.337,20.32 22.733,20.828 23.241,20.828 23.749,20.828 24.257,20.828 24.765,20.828 25.273,20.828 25.781,20.828 26.289,20.828 26.797,20.828 27.305,20.828 27.813,20.828 28.321,20.828 28.829,20.828 29.337,20.828 22.733,21.336 23.241,21.336 23.749,21.336 24.257,21.336 24.765,21.336 25.273,21.336 25.781,21.336 26.289,21.336 26.797,21.336 27.305,21.336 27.813,21.336 28.321,21.336 28.829,21.336 29.337,21.336 22.733,21.844 23.749,21.844 24.257,21.844 24.765,21.844 25.273,21.844 25.781,21.844 26.289,21.844 26.797,21.844 27.305,21.844 27.813,21.844 28.321,21.844 28.829,21.844 29.337,21.844 22.733,22.352 23.241,22.352 23.749,22.352 24.257,22.352 24.765,22.352 25.273,22.352 25.781,22.352 26.289,22.352 26.797,22.352 27.305,22.352 27.813,22.352 28.321,22.352 28.829,22.352 29.337,22.352 22.733,22.86 23.241,22.86 23.749,22.86 24.257,22.86 27.813,22.86 28.321,22.86 28.829,22.86 29.337,22.86 22.733,23.368 23.241,23.368 23.749,23.368 28.321,23.368 28.829,23.368 29.337,23.368 22.733,23.876 23.241,23.876 28.321,23.876 28.829,23.876 29.337,23.876 22.733,24.384 23.241,24.384 28.321,24.384 28.829,24.384 29.337,24.384 22.733,24.892 23.241,24.892 28.321,24.892 28.829,24.892 29.337,24.892 22.733,25.4 23.241,25.4 23.749,25.4 28.321,25.4 28.829,25.4 29.337,25.4 22.733,25.908 23.241,25.908 23.749,25.908 24.257,25.908 27.813,25.908 28.321,25.908 28.829,25.908 29.337,25.908 22.733,26.416 23.241,26.416 23.749,26.416 24.257,26.416 24.765,26.416 27.305,26.416 27.813,26.416 28.321,26.416 28.829,26.416 29.337,26.416 22.733,26.924 23.241,26.924 23.749,26.924 24.257,26.924 24.765,26.924 25.273,26.924 25.781,26.924 26.289,26.924 26.797,26.924 27.305,26.924 27.813,26.924 28.321,26.924 28.829,26.924 29.337,26.924 22.733,27.432 23.241,27.432 23.749,27.432 24.257,27.432 24.765,27.432 25.273,27.432 25.781,27.432 26.289,27.432 26.797,27.432 27.305,27.432 27.813,27.432 28.321,27.432 28.829,27.432 29.337,27.432 22.733,27.94 23.241,27.94 23.749,27.94 24.257,27.94 24.765,27.94 25.273,27.94 25.781,27.94 26.289,27.94 26.797,27.94 27.305,27.94 27.813,27.94 28.321,27.94 28.829,27.94 29.337,27.94 22.733,28.448 23.241,28.448 23.749,28.448 24.257,28.448 24.765,28.448 25.273,28.448 25.781,28.448 26.289,28.448 26.797,28.448 27.305,28.448 27.813,28.448 28.321,28.448 28.829,28.448 29.337,28.448 22.733,28.956 23.241,28.956 23.749,28.956 24.257,28.956 24.765,28.956 25.273,28.956 25.781,28.956 26.289,28.956 26.797,28.956 27.305,28.956 27.813,28.956 28.321,28.956 28.829,28.956 29.337,28.956 22.733,29.464 23.241,29.464 23.749,29.464 24.257,29.464 24.765,29.464 25.273,29.464 25.781,29.464 26.289,29.464 26.797,29.464 27.305,29.464 27.813,29.464 28.321,29.464 28.829,29.464 29.337,29.464 22.733,29.972 23.241,29.972 23.749,29.972 24.257,29.972 24.765,29.972 25.273,29.972 25.781,29.972 26.289,29.972 26.797,29.972 27.305,29.972 27.813,29.972 28.321,29.972 28.829,29.972 29.337,29.972
7892RUN: D8.1 R52.2 R53.2 U1.4 U1.5 | length 26.8
  Signal Layer 2 w0.178: v1(25.908,3.048) 25.908,4.699 26.416,5.207 29.083,5.207 29.337,5.461 33.685,5.461 33.949,5.724 35.95,5.724 37.211,6.985 37.211,7.65 39.203,9.643 39.33,9.643 39.751,10.063 v1(39.751,10.922)
  Bottom Layer w0.178: v1(25.908,3.048) 25.908,3.683 26.035,3.81 26.035,4.253 26.158,4.376 26.158,4.445 ; U1.5@26.158,5.051 26.158,4.445 ; U1.4@26.658,5.051 26.658,4.56 26.543,4.445 26.158,4.445
  Bottom Layer w0.254: D8.1@37.846,9.562 38.571,9.562 38.862,9.271 39.326,9.271 R52.2@39.37,9.315 39.795,9.315 40.215,9.735 ; v1(39.751,10.922) 40.215,10.458 40.215,9.735 ; R53.2@40.894,9.735 40.215,9.735
ABST: C5.2 U2.1 | length 2.6
  Bottom Layer w0.508: U2.1@26.604,15.31 26.604,16.309 27.051,16.756 27.092,16.756 27.183,16.847 C5.2@27.94,16.847
ALX: C5.1 L3.2 U2.6
AUXFB: R4.2 R5.1 U2.3 | length 15.1
  Signal Layer 2 w0.203: v1(24.704,15.936) 26.99,15.936 v1(29.718,13.208)
  Bottom Layer w0.203: v1(29.718,13.208) 30.077,13.567 34.649,13.567 34.754,13.672 R5.1@34.754,14.478 34.754,14.942 34.925,15.113 35.433,15.113 35.604,15.284 R4.2@35.604,15.875
  Bottom Layer w0.254: v1@24.638,16.002 v1(24.704,15.936) U2.3@24.704,15.31 U2.3@24.84,15.174
BATFB: D3.2 R20.1 R22.2 U8.20 | length 8.5
  Bottom Layer w0.178: R22.2@34.417,25.737 34.417,25.273 34.544,25.146 37.719,25.146 38.138,25.565 U8.20@38.988,25.565
  Bottom Layer w0.254: D3.2@32.512,24.421 32.512,25.146 R20.1@32.512,25.737 R22.2@34.417,25.737
BG1: Q2.2 Q4.2 R6.2 R8.2 | length 12.1
  Top Layer w0.381: Q2.2@39.98,34.021 40.528,34.021 40.767,33.782 v1(40.767,32.766) ; Q4.2@43.79,34.021 44.338,34.021 v1(44.577,33.782)
  Signal Layer 3 w0.381: v1(40.767,32.766) 44.323,32.766 44.577,33.02 v1(44.577,33.782)
  Bottom Layer w0.381: v1(44.577,33.782) 44.577,31.159 R6.2@43.942,31.159 R8.2@45.339,31.159
BG2: Q6.2 Q7.2 R44.2 R45.2 | length 11.9
  Top Layer w0.381: Q6.2@10.643,34.021 11.191,34.021 11.303,33.909 v1(11.303,32.766) ; Q7.2@14.453,34.021 14.971,34.021 14.986,34.036 15.113,33.909 v1(15.113,32.766)
  Signal Layer 3 w0.381: v1(11.303,32.766) v1(15.113,32.766)
  Bottom Layer w0.381: v1(15.113,32.766) 15.958,31.921 R45.2@17.78,31.921 R44.2@19.177,31.921
BGDN1: R8.1 U1.29 | length 36
  Signal Layer 3 w0.381: v1(28.829,11.557) 28.829,12.459 29.067,12.698 29.067,15.097 30.353,16.383 33.02,16.383 36.449,19.812 36.449,24.257 37.973,25.781 37.973,28.194 38.608,28.829 46.99,28.829 47.117,28.956 v1(47.117,29.464)
  Bottom Layer w0.254: U1.29@27.658,10.951 27.658,11.415 27.971,11.728 28.658,11.728 v1(28.829,11.557)
  Bottom Layer w0.381: R8.1@45.339,30.309 46.386,30.309 47.117,29.578 v1(47.117,29.464)
BGDN2: R45.1 U1.22 | length 23.6
  Signal Layer 3 w0.381: v1(19.431,25.781) 19.685,25.527 19.685,15.087 21.183,13.589 21.933,13.589 22.731,12.791 22.731,12.77 22.86,12.64 22.86,12.065 v1(23.114,11.811)
  Bottom Layer w0.254: v1(23.114,11.811) 23.197,11.728 23.959,11.728 24.158,11.529 U1.22@24.158,10.951
  Bottom Layer w0.381: R45.1@17.78,31.071 17.78,30.48 18.669,29.591 18.669,27.445 19.431,26.683 v1(19.431,25.781)
BGUP1: R6.1 U1.28 | length 35.9
  Signal Layer 3 w0.381: v1(28.448,12.954) 28.448,15.3 30.157,17.009 32.779,17.009 35.687,19.917 35.687,24.638 37.347,26.298 37.347,28.39 38.421,29.464 v1(46.355,29.464)
  Bottom Layer w0.254: U1.28@27.158,10.951 27.158,11.664 27.813,12.319 28.194,12.319 28.448,12.573 v1(28.448,12.954)
  Bottom Layer w0.381: R6.1@43.942,30.309 43.942,29.845 44.323,29.464 v1(46.355,29.464)
BGUP2: R44.1 U1.23 | length 23.2
  Signal Layer 3 w0.381: v1(19.431,27.559) 20.32,26.67 20.32,17.907 22.733,15.494 22.733,13.611 23.312,13.032 23.312,13.01 23.495,12.827 v1(23.495,12.573)
  Bottom Layer w0.254: v1(23.495,12.573) 23.876,12.192 24.384,12.192 24.658,11.918 U1.23@24.658,10.951
  Bottom Layer w0.381: R44.1@19.177,31.071 19.177,30.226 19.431,29.972 v1(19.431,27.559) 19.431,28.023
BST1: C10.1 D1.2 U1.30 | length 5.3
  Top Layer w0.381: D1.2@28.612,9.652 28.612,10.832 28.702,10.922 v1(29.718,10.922)
  Bottom Layer w0.254: U1.30@28.158,10.951 30.197,10.951 30.563,10.585 C10.1@30.988,10.585
BST2: C62.1 D2.2 U1.21 | length 3.6
  Top Layer w0.381: v1(22.958,10.951) 23.241,10.668 23.241,10.414 D2.2@23.368,10.287
  Bottom Layer w0.203: C62.1@21.209,10.712 21.673,11.176 22.733,11.176 v1(22.958,10.951) U1.21@23.658,10.951
COMP: C17.2 R33.2 U1.37 | length 3.1
  Top Layer w0.203: R33.2@29.127,7.62 29.591,7.62 v1(29.972,7.239)
  Bottom Layer w0.203: U1.37@28.858,7.251 28.87,7.239 C17.2@30.944,7.239